# Altium PCB LCD_Dev_PCB.PcbDoc (part 1 of 2)
Units mil, origin at the board's own origin, x right, y up, seen from the top; angles counter-clockwise.
Board outline 2300 x 2120 mil, 4 copper layers (Top Layer, GND, 3.3V, Bottom Layer), stack 35.634 mil thick; 60 components, 58 nets, 366 pads, 68 vias.
Unrouted connection lines stored in the file: 11.
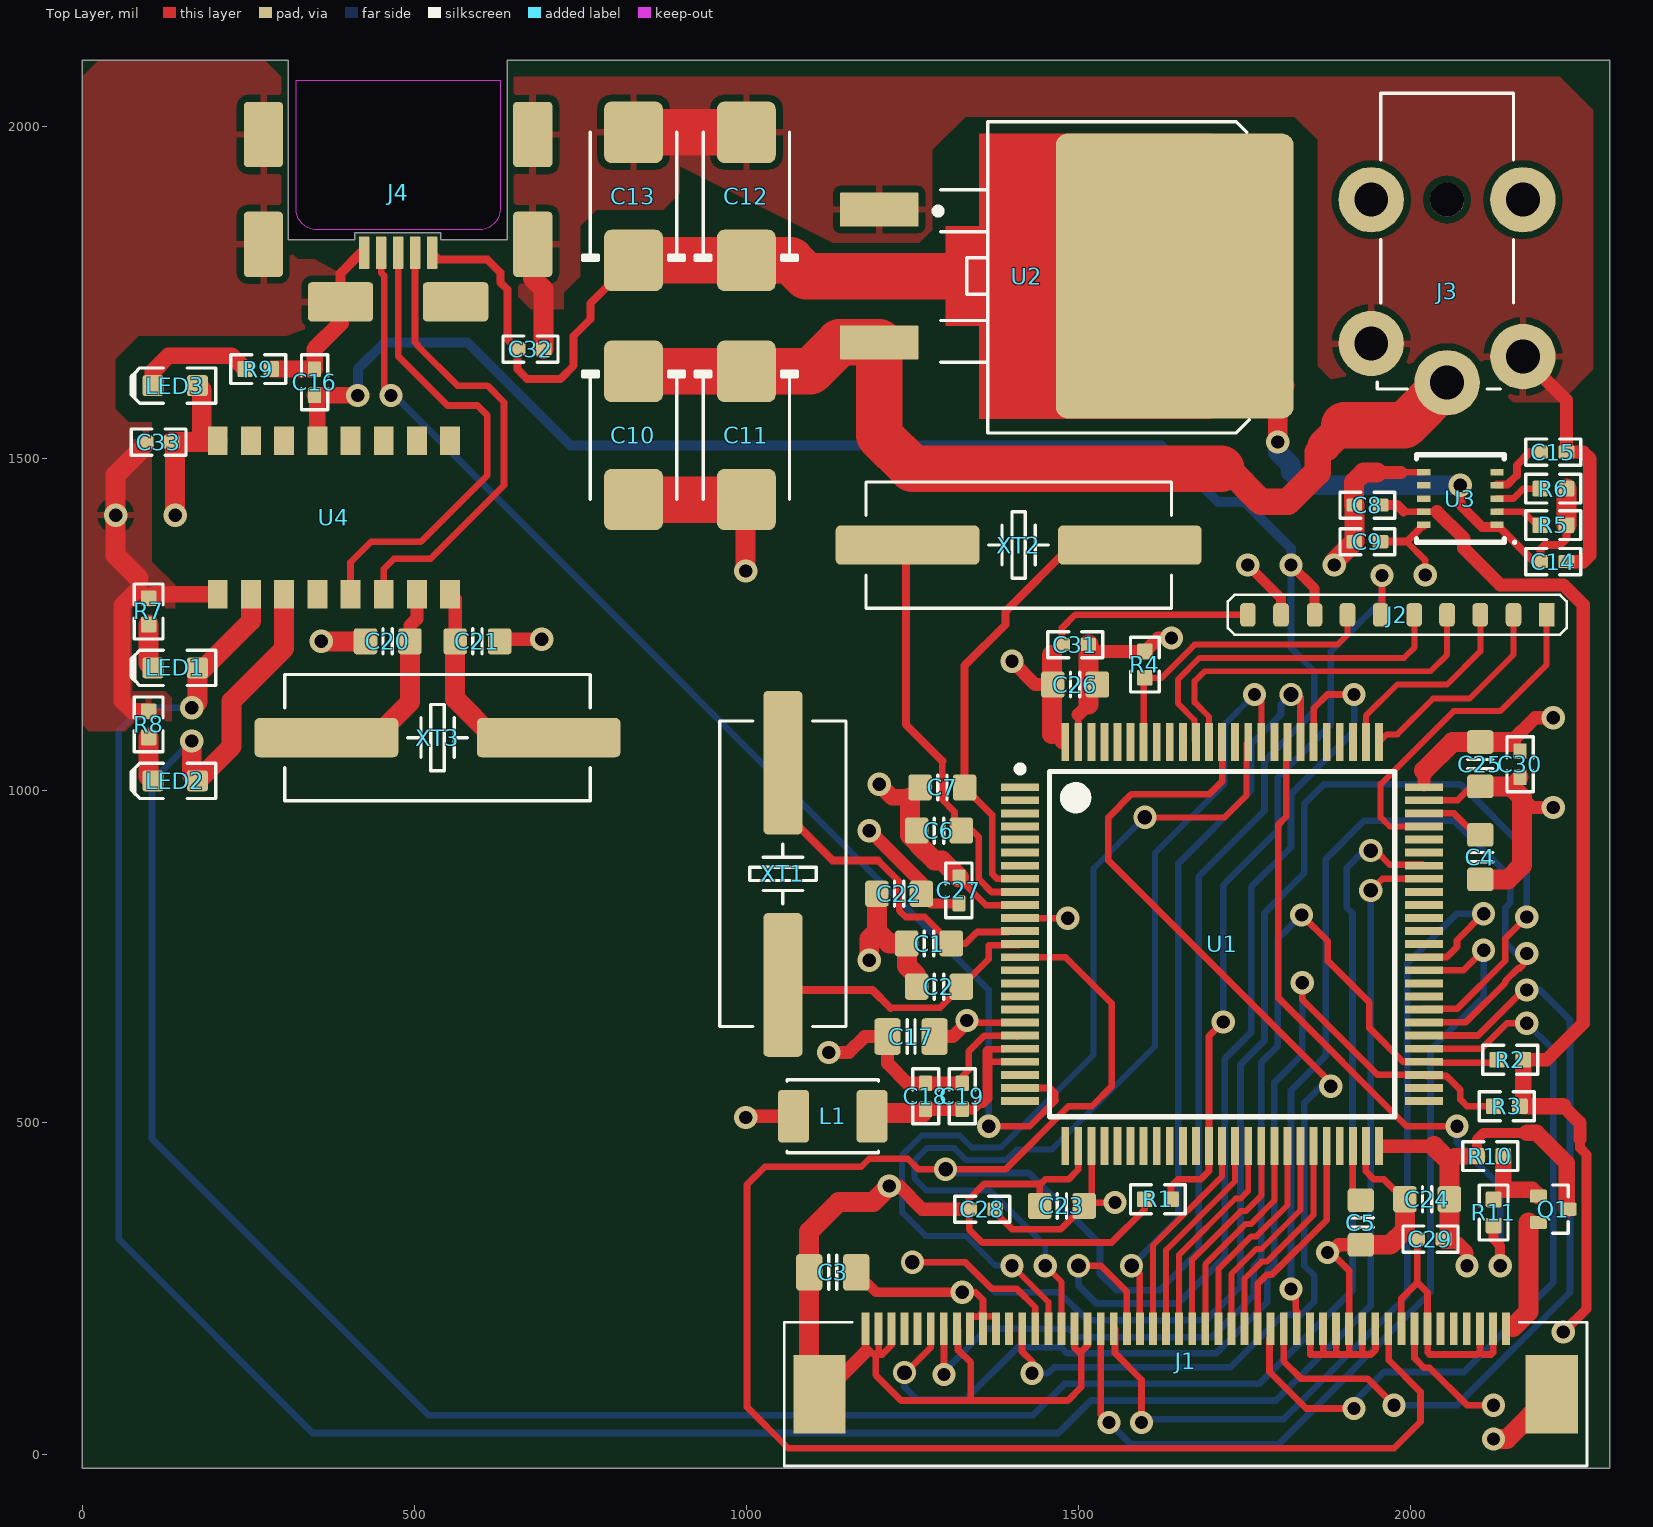
[diagram p0: Top Layer view]
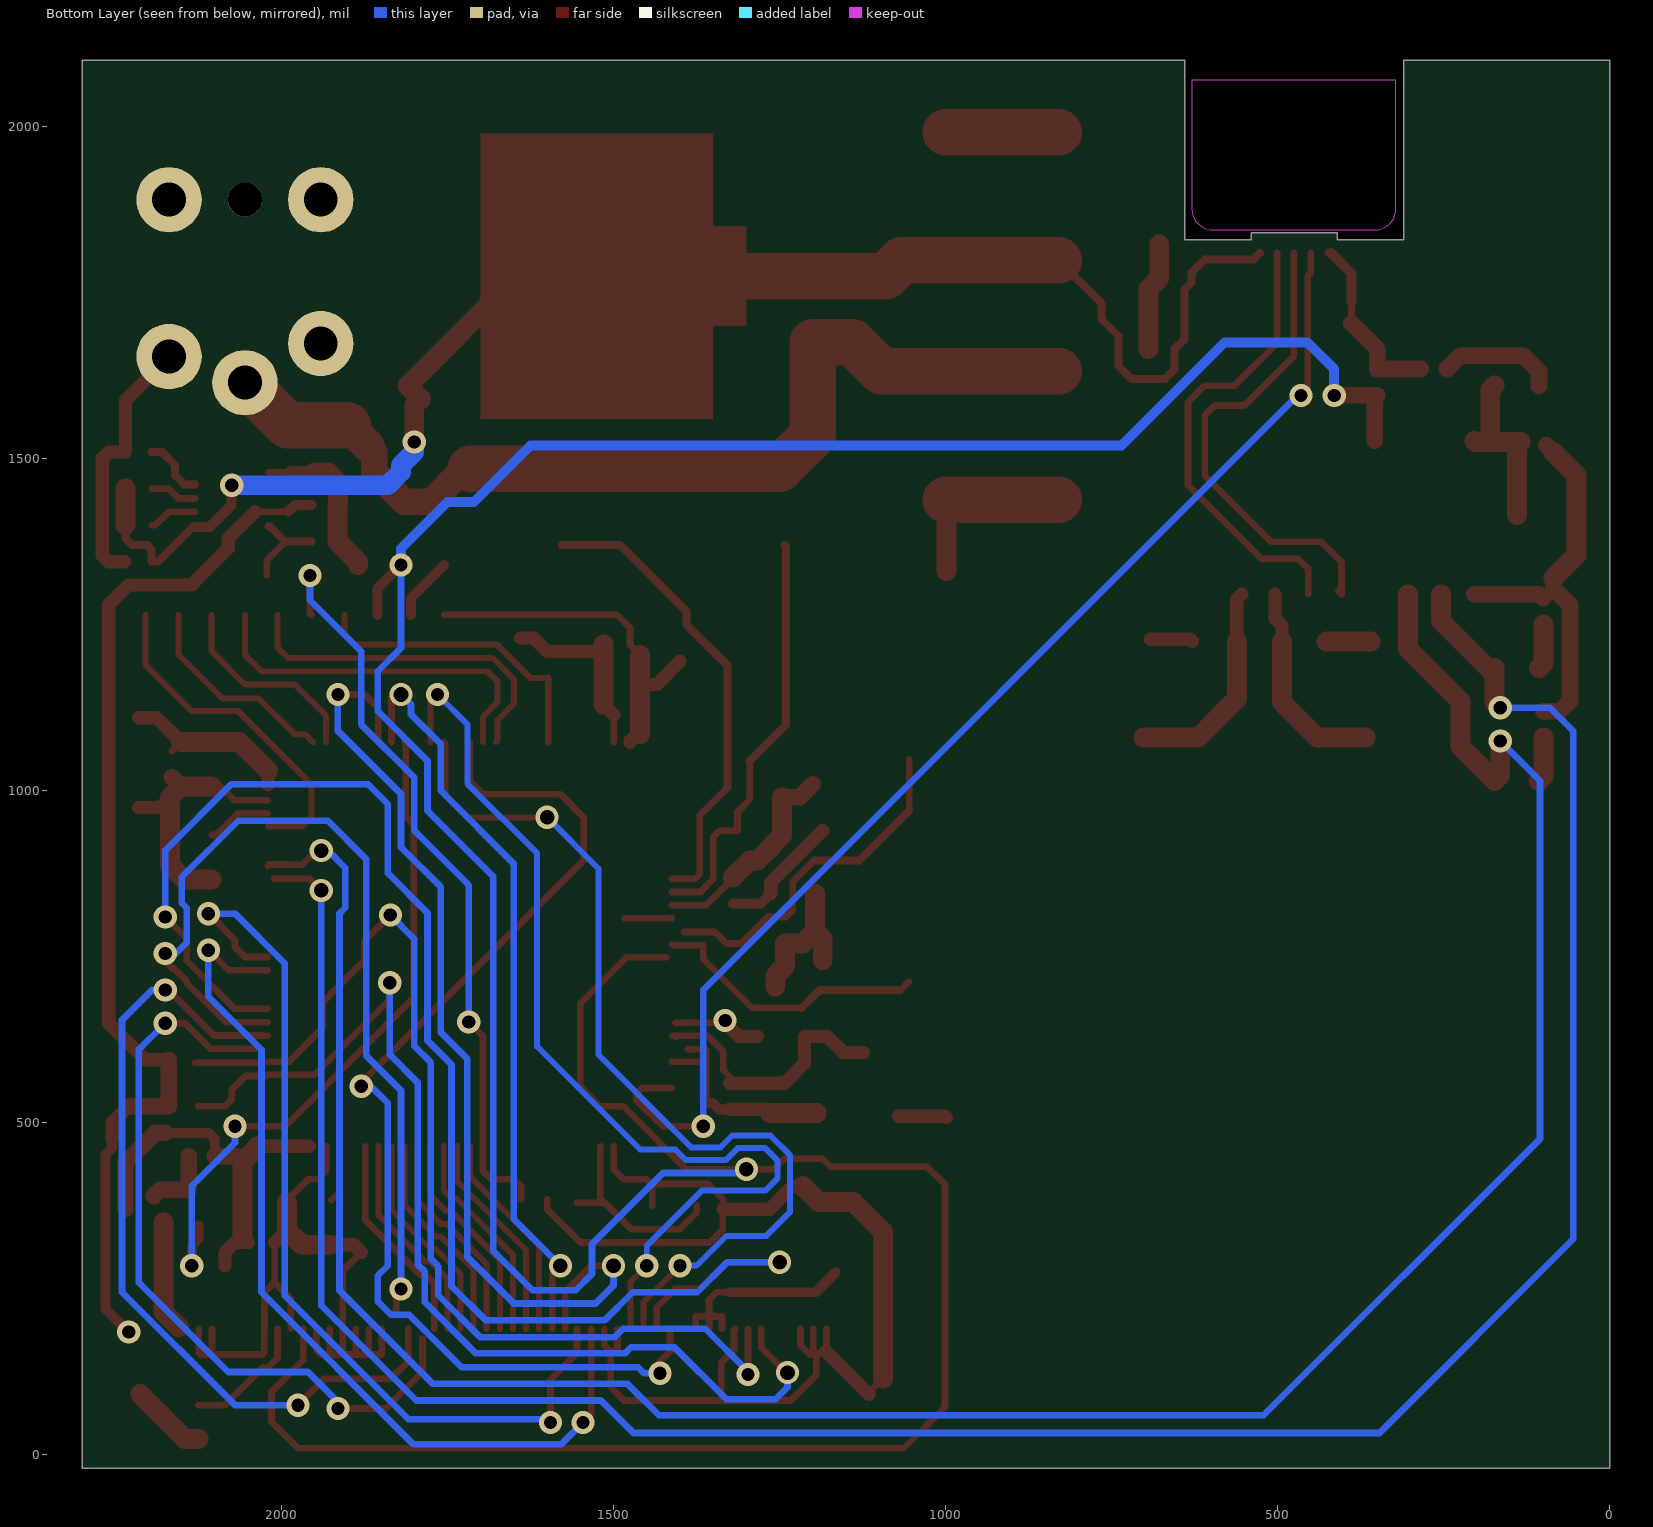
[diagram p1: Bottom Layer view, seen from below]
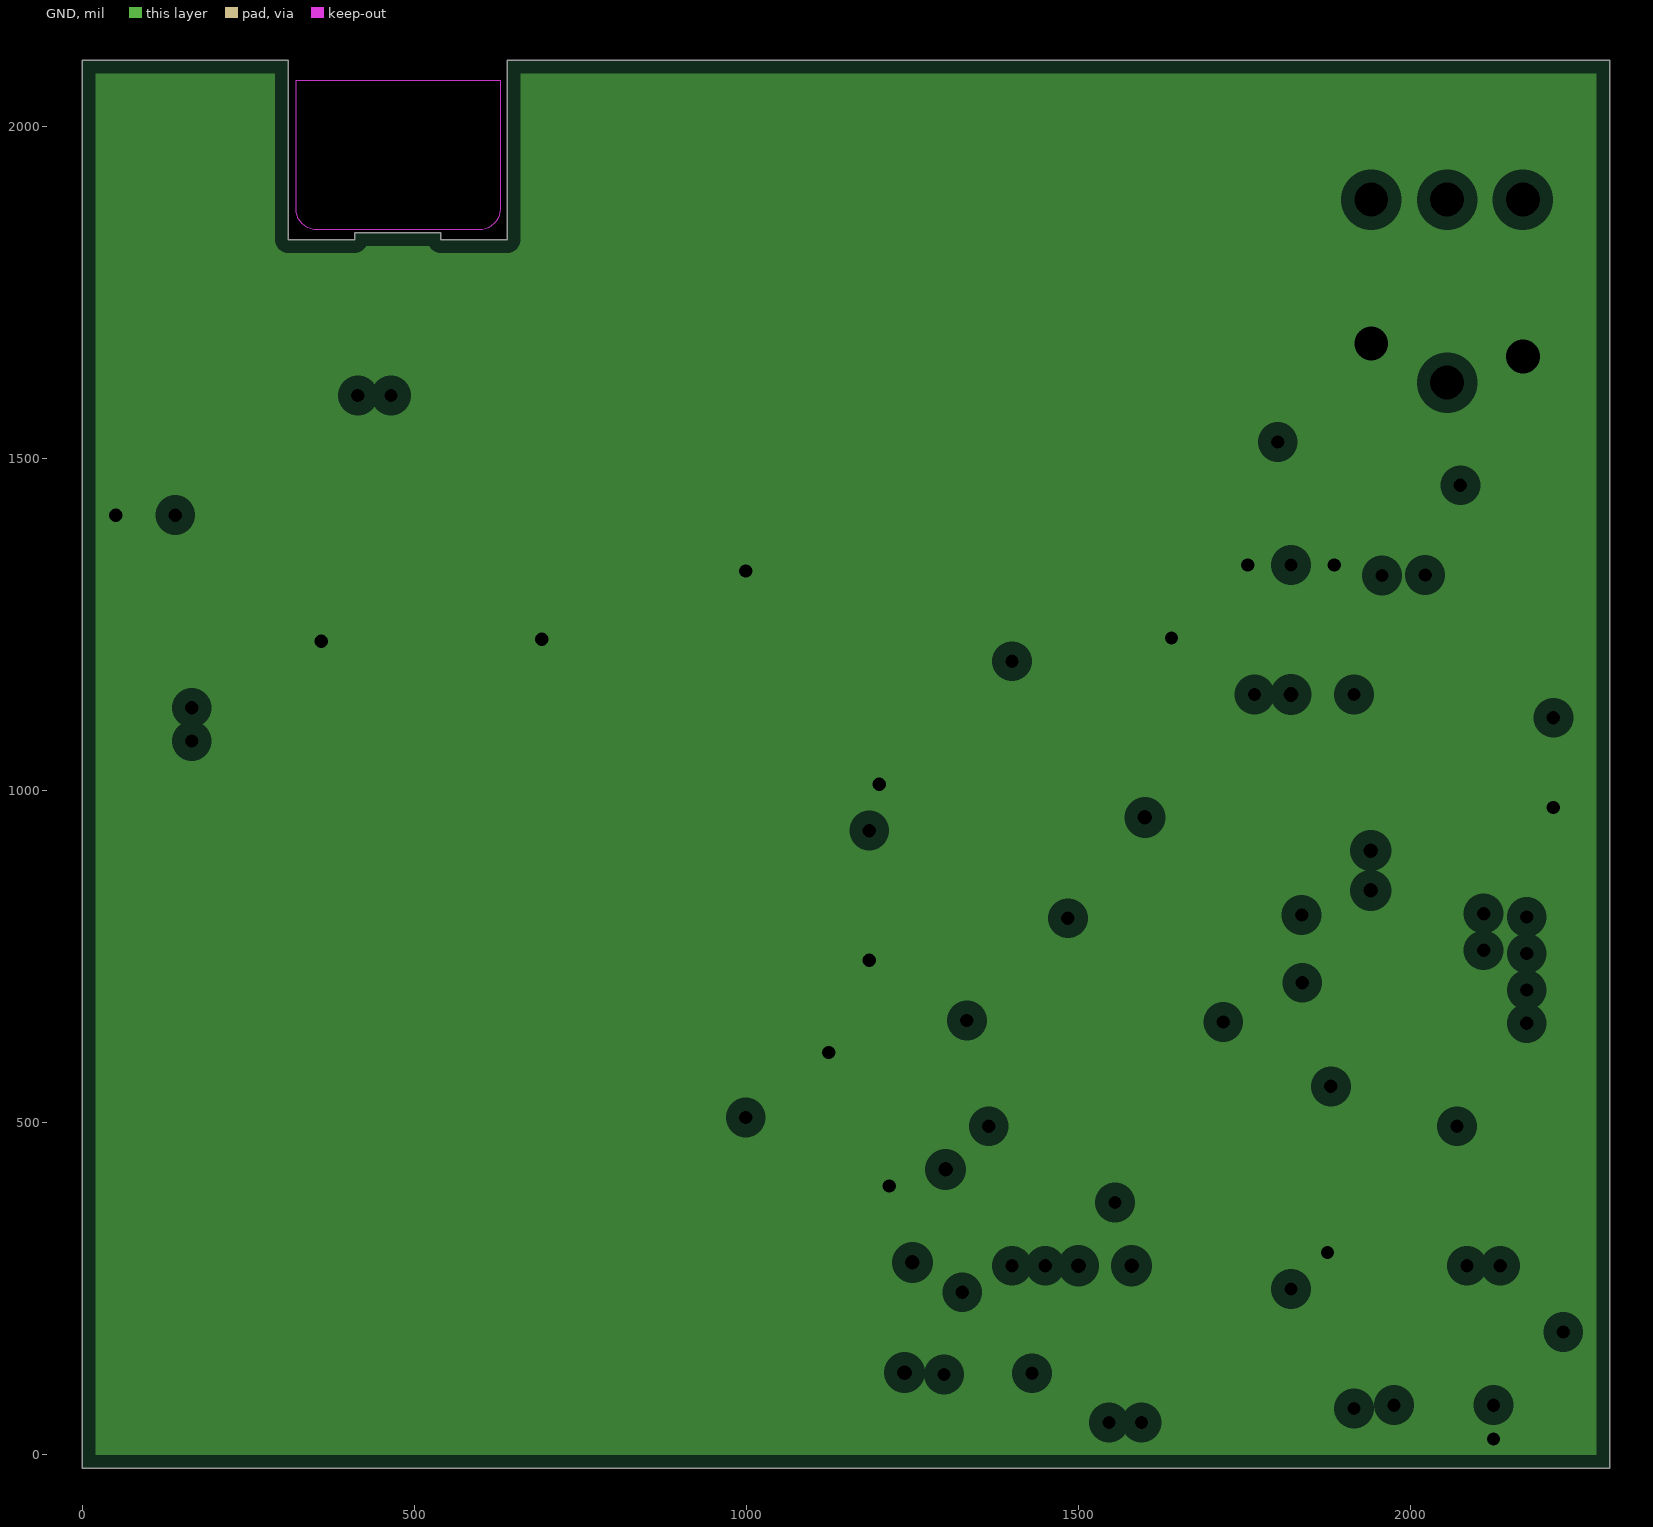
[diagram p2: GND, clearances drawn from the general rule]
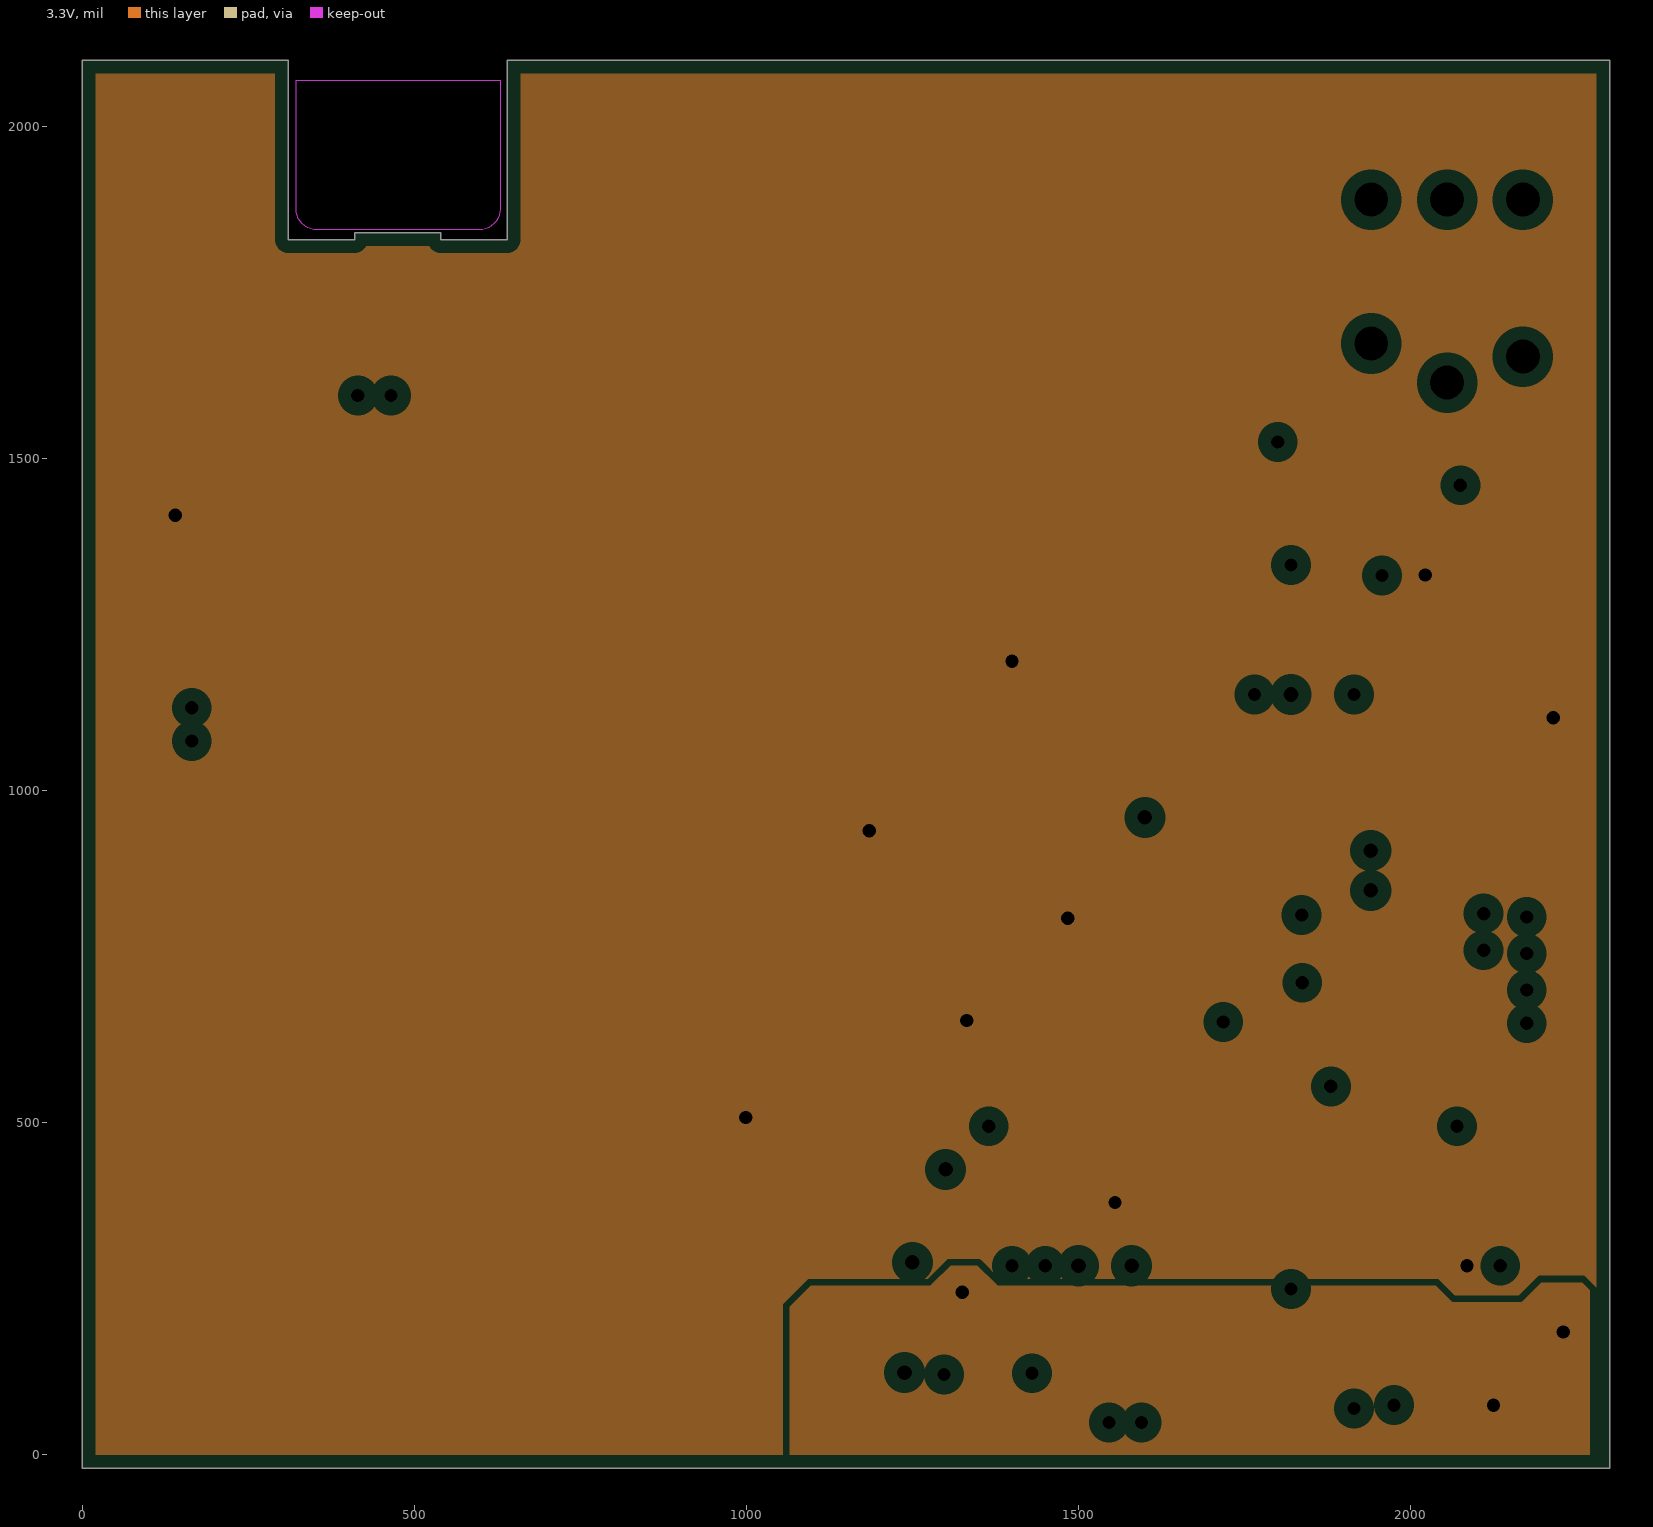
[diagram p3: 3.3V, clearances drawn from the general rule]
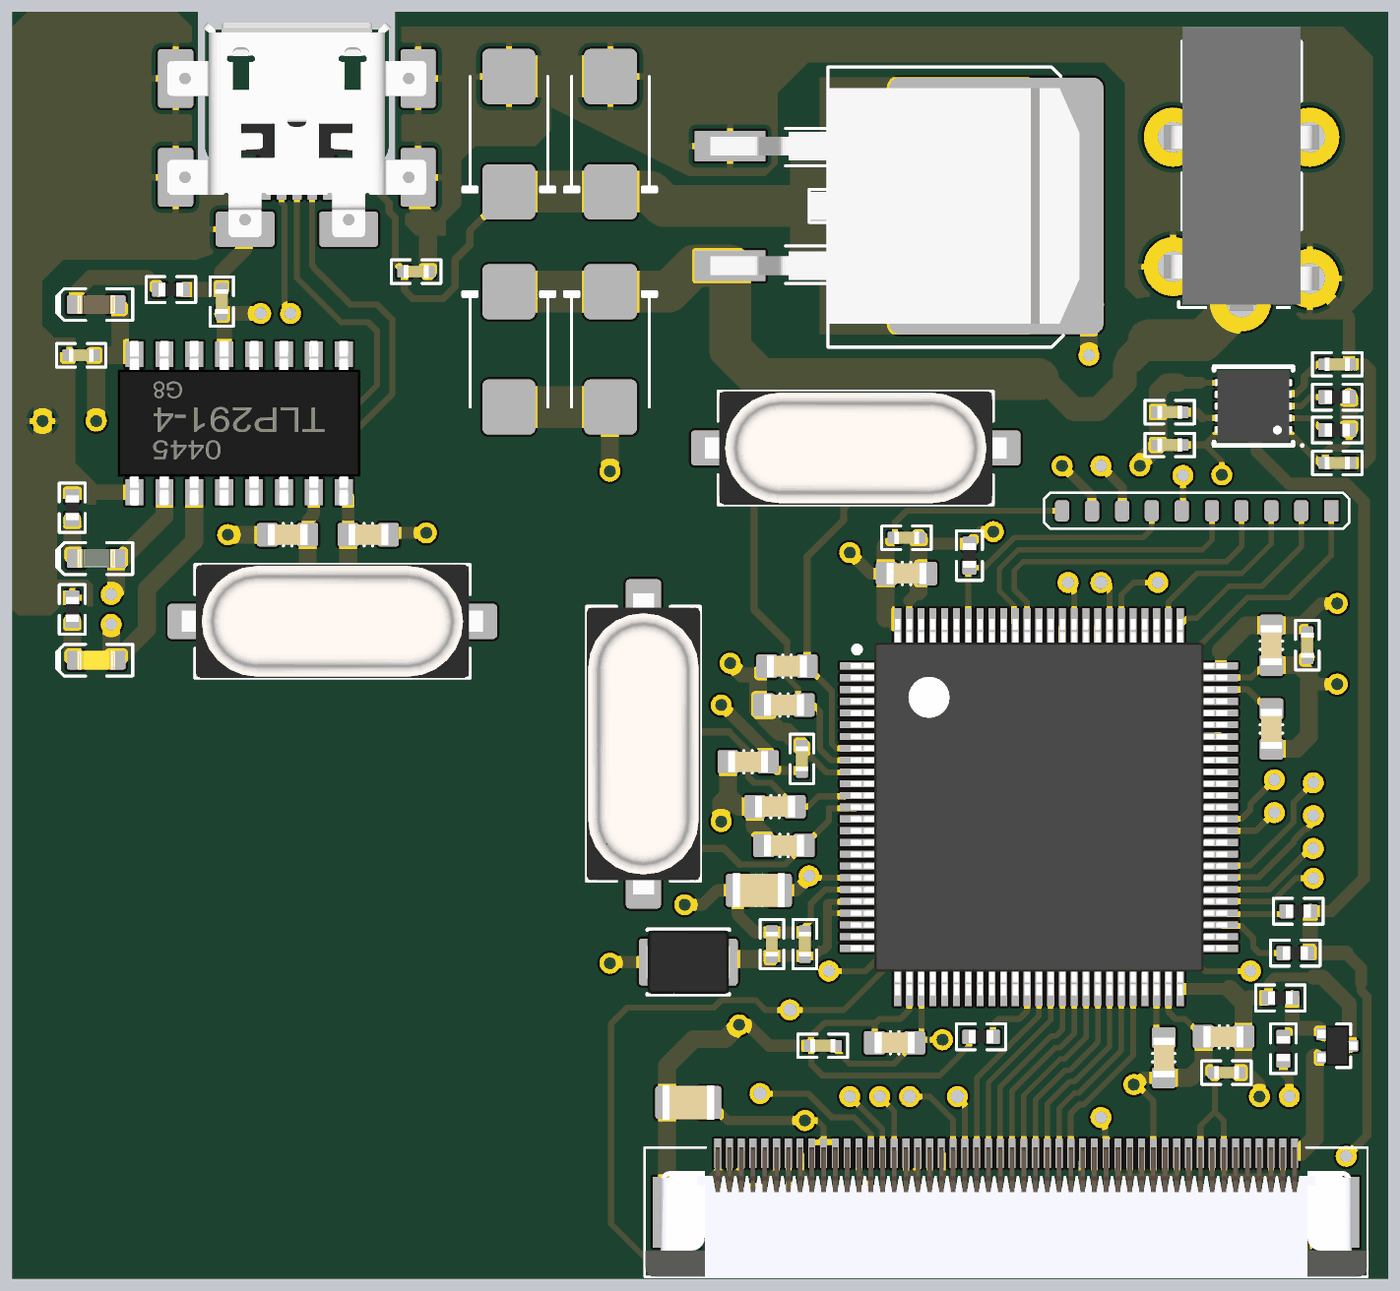
[diagram p4: 3D render of the assembled board from above, using the file's embedded part models]

## Layer stack, top to bottom
Top Solder: solder mask 0.4, Solder Resist, Dk 3.5
Top Layer: signal copper 1.4
Dielectric 1: core 10, FR-4, Dk 4.2
GND: plane copper 1.417, net GND
Dielectric 2: prepreg 10, Dk 4.2
3.3V: plane copper 1.417, net (Multiple Nets)
Dielectric 3: core 10, Dk 4.2
Bottom Layer: signal copper 1.4
Bottom Solder: solder mask 0.4, Solder Resist, Dk 3.5

## Board outline
2300,-20 0,-20 0,2100 310,2100 310,1830 410,1830 410,1840 540,1840 540,1830 640,1830 640,2100 2300,2100

## Design rules (kind name [scope] priority, off if disabled: settings)
Clearance [All] p1: gap=10 ignorepadtopadclearanceinfootprint=FALSE except(0: Arc-Hole Track-Hole SMDPad-Hole THPad-Hole Via-Hole Fill-Hole Poly-Hole Region-Hole Text-Hole; 7: Track-Track Track-SMDPad SMDPad-SMDPad; 9: SMDPad-Poly SMDPad-Region)
MinimumSolderMaskSliver [All] p1: minsoldermaskwidth=1
PlaneClearance [All] p1: clearance=20
PlaneConnect [All] p1: planeconnectstyle=Relief reliefexpansion=20 reliefentries=4 reliefconductorwidth=10 reliefairgap=10
PolygonConnect [All] p1: connectstyle=Relief reliefconductorwidth=10 reliefentries=4 polygonreliefangle="90 Angle" airgapwidth=10
RoutingVias [All] p1: holewidth=28 width=50 viastyle="Through Hole" minholewidth=12 minwidth=20 maxholewidth=28 maxwidth=50
SilkToSilkClearance [All] p1: silktosilkclearance=7
SilkToSolderMaskClearance [IsPad] p1: minsilkscreentomaskgap=0 clearancetoexposedcopper=TRUE
SolderMaskExpansion [All] p1: expansion=4
Width [All] p1: maxlimit=70 minlimit=5 preferedwidth=10 minimp=50.000000 maximp=50.000000 favimp=50.000000
25 further rules are at their usual default settings.

## Components (designator, comment, footprint, x,y, rotation, side; value= is the part's Value field where it differs from the comment)
C1 "approved sub OK" CAPC1608X90N 1275,770 r180 top value=4p7
C2 "approved sub OK" CAPC1608X90N 1290,705 r180 top value=4p7
C3 "approved sub OK" CAPC2012X135N 1130,275 r180 top value=4µ7
C4 "approved sub OK" CAPC1608X90N 2105,900 r270 top value=2u2
C5 "approved sub OK" CAPC1608X90N 1925,350 r270 top value=2u2
C6 "approved sub OK" CAPC1608X90N 1290,940 r180 top value=4p7
C7 "approved sub OK" CAPC1608X90N 1295,1005 r180 top value=4p7
C8 "1µ" CAPC1005X55N 1935,1430 r180 top
C9 "1µ" CAPC1005X55N 1935,1375 r180 top
C10 "47µ" CAPMP6032X280N 830,1535 r270 top
C11 "47µ" CAPMP6032X280N 1000,1535 r270 top
C12 "47µ" CAPMP6032X280N 1000,1895 r90 top
C13 "47µ" CAPMP6032X280N 830,1895 r90 top
C14 "1µ" CAPC1005X55N 2215,1345 r0 top
C15 "10n" CAPC1005X55N 2215,1510 r0 top
C16 "1µ" CAPC1005X55N 350,1615 r90 top
C17 "approved sub OK" CAPC2012X135N 1248,630 r180 top value=4µ7
C18 "1µ" CAPC1005X55N 1270,540 r90 top
C19 "10n" CAPC1005X55N 1325,540 r90 top
C20 "approved sub OK" CAPC1608X90N 460,1225 r180 top value=4p7
C21 "approved sub OK" CAPC1608X90N 595,1225 r0 top value=4p7
C22 "approved sub OK" CAPC1608X90N 1230,845 r180 top value=1µ
C23 "approved sub OK" CAPC1608X90N 1475,375 r180 top value=1µ
C24 "approved sub OK" CAPC1608X90N 2025,385 r180 top value=1µ
C25 "approved sub OK" CAPC1608X90N 2105,1040 r270 top value=1µ
C26 "approved sub OK" CAPC1608X90N 1495,1160 r0 top value=1µ
C27 "10n" CAPC1005X55N 1320,850 r90 top
C28 "10n" CAPC1005X55N 1355,370 r180 top
C29 "10n" CAPC1005X55N 2030,325 r180 top
C30 "10n" CAPC1005X55N 2165,1040 r270 top
C31 "10n" CAPC1005X55N 1495,1220 r0 top
C32 "100n" CAPC1005X55N 675,1665 r0 top
C33 "100n" CAPC1005X55N 115,1525 r180 top
J1 "*" ER-CON50HT-1 2163.39,229.37 r180 top
J2 "*" "SWJ-DP connector" 2235,1295 r180 top
J3 "*" CONN_PWR_JACK_0.7x2.35mm 2055,2075.04 r180 top value="0.7mm ID, 2.35mm OD"
J4 "USB Micro Type B" USB_Micro-B_Molex_SMD 475.59,2064.92 r270 top
L1 "SMD-322522" INDM3225X240N 1130,510 r0 top value=22µ
LED1 "Green" LED-0603-GREEN 140,1185 r180 top
LED2 "Yellow" LED-0603-YELLOW 140,1015 r180 top
LED3 "Red" LED-0603-RED 140,1610 r180 top
Q1 "P-Channel" SOT523F 2215,370 r0 top
R1 "Thick Film" RESC1005X40N 1619.69,385 r180 top value=10K
R2 "Thick Film" RESC1005X40N 2150,595 r180 top value=2K2
R3 "Thick Film" RESC1005X40N 2145,525 r180 top value=2K2
R4 "Thick Film" RESC1005X40N 1600,1190 r90 top value=10K
R5 "Thick Film" RESC1005X40N 2215,1400 r180 top value=2K2
R6 "Thick Film" RESC1005X40N 2215,1455 r180 top value=2K2
R7 "Thick Film" RESC1005X40N 100,1270 r90 top value=2K2
R8 "Thick Film" RESC1005X40N 100,1100 r90 top value=2K2
R9 "Thick Film" RESC1005X40N 265,1635 r0 top value=2K2
R10 "Thick Film" RESC1005X40N 2120,450 r0 top value=10K
R11 "Thick Film" RESC1005X40N 2125,365 r270 top value=330R
U1 "*" LQFP100_STM32F4 1646.26,829.13 r0 top
U2 "AP1086" TO263-3L 1422.5,1775 r180 top
U3 "*" 10LD3X3DFN 2075,1440 r180 top
U4 "*" SOP16 354,1095.9 r90 top
XT1 "6.00MHz" CRYSTAL_HC49-US-SM 1055,875 r270 top
XT2 "6.00MHz" CRYSTAL_HC49-US-SM 1410,1370 r0 top
XT3 "6.00MHz" CRYSTAL_HC49-US-SM 535,1080 r0 top

## Footprints (in the part's own frame and the unit in brackets; to place one, negate y for a bottom-side part, rotate by r counter-clockwise, add the part's x,y. Pads: shape width x height; smd on the part's side, far side on the other; paste and mask are expansions set on the pad)
10LD3X3DFN [mm] "10 PIN DFPNL (DFN) Body 3x3mm, Pitch 0.50mm, IPC Medium Density"
  rect 0.5x0.25 smd: 1(-1.4,1) 2(-1.4,0.5) 3(-1.4,0) 4(-1.4,-0.5) 5(-1.4,-1) 6(1.4,-1) 7(1.4,-0.5) 8(1.4,0) 9(1.4,0.5) 10(1.4,1)
  silkscreen extent -2.12,-1.67 1.67,1.72, body extent -1.63,-1.53 1.63,1.53, height 0.9
CAPC1005X55N [mm] "Chip Capacitor, Body 1.0x0.5mm, EIA 0402, IPC Medium Density"
  round 0.2 on Mech15: 0(0,0)
  rrect20% 0.6x0.5 smd: 1(-0.5,0) 2(0.5,0)
  Top Layer pour cut-out: -0.325,0.375 -0.2,0.5 0.2,0.5 0.325,0.375 0.325,-0.375 0.2,-0.5 -0.2,-0.5 -0.325,-0.375
  silkscreen extent -1.05,-0.5 1.05,0.5, body extent -0.52,-0.27 0.53,0.28, height 0.55
CAPC1608X90N [mm] "Chip Capacitor, Body 1.6x0.8mm, EIA 0603, IPC Medium Density"
  round 0.254 on Mech15: 0(0,0)
  rrect25% 0.9x1 smd: 1(-0.85,0) 2(0.85,0)
  Top Layer pour cut-out: -0.6,0.5 -0.4,0.7 0.4,0.7 0.6,0.5 0.6,-0.5 0.4,-0.7 -0.4,-0.7 -0.6,-0.5
  silkscreen extent -0.18,-0.48 0.18,0.48, body extent -0.85,-0.45 0.85,0.45, height 0.89
CAPC2012X135N [mm] "Chip Capacitor, Body 2.0x1.2mm, EIA 0805, IPC Medium Density"
  round 0.254 on Mech15: 0(0,0)
  rrect25% 1x1.4 smd: 1(-0.9,0) 2(0.9,0)
  Top Layer pour cut-out: -0.675,0.7 -0.475,0.9 0.475,0.9 0.675,0.7 0.675,-0.7 0.475,-0.9 -0.475,-0.9 -0.675,-0.7
  silkscreen extent -0.15,-0.65 0.15,0.65, body extent -1.1,-0.72 1.1,0.73, height 1.34
CAPMP6032X280N [mm] "Capacitor, polarized, Molded Body, EIA 535BAAC size C; 6.00mm L X 3.20mm W X 2.80mm H"
  round 0.508 on Mech15: 0(0,0)
  rrect25% 2.35x2.25 smd: 1(-2.45,0) 2(2.45,0)
  silkscreen extent -2.45,-1.95 2.45,1.95, body extent -3,-1.6 3,1.6, height 2.8
CONN_PWR_JACK_0.7x2.35mm [mm] "Power Connector, 0.7mm ID, 2.35mm OD"
  round 2.5 hole 1.3: 1(0,11.7) 2(-2.9,10.7) 3(2.9,10.2) MH(-2.9,4.7) MH(2.9,4.7)
  round 1.3 hole 1.3 unplated: MH(0,4.7)
  silkscreen extent -2.54,0.63 2.67,11.94, body extent -3.31,0 3.31,12.05, height 5
CRYSTAL_HC49-US-SM [mm] "SMD Crystal HC49/US-SM package"
  round 0.508 on Mech15: 0(0,0)
  rrect25% 5.5x1.5 smd: 1(-4.25,0) 2(4.25,0)
  silkscreen extent -5.84,-2.41 5.84,2.41, body extent -6.4,-2.41 6.4,2.42, height 4.29
ER-CON50HT-1 [mm] "50 pins 0.5mm pitch SMD horizontal type FPC ZIF"
  rect 0.3x1.25 smd: 1(0.5,1) 2(1,1) 3(1.5,1) 4(2,1) 5(2.5,1) 6(3,1) 7(3.5,1) 8(4,1) 9(4.5,1) 10(5,1) 11(5.5,1) 12(6,1) 13(6.5,1) 14(7,1) 15(7.5,1) 16(8,1) 17(8.5,1) 18(9,1) 19(9.5,1) 20(10,1) 21(10.5,1) 22(11,1) 23(11.5,1) 24(12,1) 25(12.5,1) 26(13,1) 27(13.5,1) 28(14,1) 29(14.5,1) 30(15,1) 31(15.5,1) 32(16,1) 33(16.5,1) 34(17,1) 35(17.5,1) 36(18,1) 37(18.5,1) 38(19,1) 39(19.5,1) 40(20,1) 41(20.5,1) 42(21,1) 43(21.5,1) 44(22,1) 45(22.5,1) 46(23,1) 47(23.5,1) 48(24,1) 49(24.5,1) 50(25,1)
  rect 2x3 smd: 51(-1.25,3.5) 52(26.75,3.5)
  silkscreen extent -2.6,0.75 28.1,6.25, body extent -2.57,0.75 28.08,6.25, height 2.06
INDM3225X240N [mm] "Molded Inductor, 2-Leads, Body 3.2x2.5mm, IPC Medium Density"
  round 0.508 on Mech15: 0(0,0)
  rrect25% 1.2x2 smd: 1(-1.5,0) 2(1.5,0)
  silkscreen extent -1.75,-1.4 1.75,1.4, body extent -1.79,-1.35 1.79,1.35, height 2.4
LED-0603-GREEN [mm]
  round 0.254 on Mech15: 0(0,0)
  rrect25% 0.8x0.8 smd: A(-0.85,0) K(0.85,0)
  Top Layer pour cut-out: -0.5,0.5 0.5,0.5 0.5,-0.5 -0.5,-0.5
  silkscreen extent -1.55,-0.67 1.67,0.67, body extent -0.8,-0.4 0.8,0.4, height 0.75
LED-0603-RED [mm]
  round 0.254 on Mech15: 0(0,0)
  rrect25% 0.8x0.8 smd: A(-0.85,0) K(0.85,0)
  Top Layer pour cut-out: -0.5,0.5 0.5,0.5 0.5,-0.5 -0.5,-0.5
  silkscreen extent -1.55,-0.67 1.67,0.67, body extent -0.8,-0.4 0.8,0.4, height 0.75
LED-0603-YELLOW [mm]
  round 0.254 on Mech15: 0(0,0)
  rrect25% 0.8x0.8 smd: A(-0.85,0) K(0.85,0)
  Top Layer pour cut-out: -0.5,0.5 0.5,0.5 0.5,-0.5 -0.5,-0.5
  silkscreen extent -1.55,-0.67 1.67,0.67, body extent -0.8,-0.4 0.8,0.4, height 0.75
LQFP100_STM32F4 [mm] "TSQFP, 100-Leads, Body 14.00x14.00mm, Pitch 0.50mm, IPC Medium Density"
  rect 1.45x0.3 smd: 1(-5.947,4.476) 2(-5.947,3.976) 3(-5.947,3.476) 4(-5.947,2.976) 5(-5.947,2.476) 6(-5.947,1.976) 7(-5.947,1.476) 8(-5.947,0.976) 9(-5.947,0.476) 10(-5.947,-0.024) 11(-5.947,-0.524) 12(-5.947,-1.024) 13(-5.947,-1.524) 14(-5.947,-2.024) 15(-5.947,-2.524) 16(-5.947,-3.024) 17(-5.947,-3.524) 18(-5.947,-4.024) 19(-5.947,-4.524) 20(-5.947,-5.024) 21(-5.947,-5.524) 22(-5.947,-6.024) 23(-5.947,-6.524) 24(-5.947,-7.024) 25(-5.947,-7.524) 51(9.503,-7.524) 52(9.503,-7.024) 53(9.503,-6.524) 54(9.503,-6.024) 55(9.503,-5.524) 56(9.503,-5.024) 57(9.503,-4.524) 58(9.503,-4.024) 59(9.503,-3.524) 60(9.503,-3.024) 61(9.503,-2.524) 62(9.503,-2.024) 63(9.503,-1.524) 64(9.503,-1.024) 65(9.503,-0.524) 66(9.503,-0.024) 67(9.503,0.476) 68(9.503,0.976) 69(9.503,1.476) 70(9.503,1.976) 71(9.503,2.476) 72(9.503,2.976) 73(9.503,3.476) 74(9.503,3.976) 75(9.503,4.476)
  rect 0.3x1.45 smd: 26(-4.222,-9.249) 27(-3.722,-9.249) 28(-3.222,-9.249) 29(-2.722,-9.249) 30(-2.222,-9.249) 31(-1.722,-9.249) 32(-1.222,-9.249) 33(-0.722,-9.249) 34(-0.222,-9.249) 35(0.278,-9.249) 36(0.778,-9.249) 37(1.278,-9.249) 38(1.778,-9.249) 39(2.278,-9.249) 40(2.778,-9.249) 41(3.278,-9.249) 42(3.778,-9.249) 43(4.278,-9.249) 44(4.778,-9.249) 45(5.278,-9.249) 46(5.778,-9.249) 47(6.278,-9.249) 48(6.778,-9.249) 49(7.278,-9.249) 50(7.778,-9.249) 76(7.778,6.201) 77(7.278,6.201) 78(6.778,6.201) 79(6.278,6.201) 80(5.778,6.201) 81(5.278,6.201) 82(4.778,6.201) 83(4.278,6.201) 84(3.778,6.201) 85(3.278,6.201) 86(2.778,6.201) 87(2.278,6.201) 88(1.778,6.201) 89(1.278,6.201) 90(0.778,6.201) 91(0.278,6.201) 92(-0.222,6.201) 93(-0.722,6.201) 94(-1.222,6.201) 95(-1.722,6.201) 96(-2.222,6.201) 97(-2.722,6.201) 98(-3.222,6.201) 99(-3.722,6.201) 100(-4.222,6.201)
  silkscreen extent -6.07,-8.12 8.38,5.3, body extent -6.22,-9.52 9.78,6.48, height 1.6
RESC1005X40N [mm] "Chip Resistor, Body 1.0x0.5mm, EIA 0402, IPC Medium Density"
  round 0.2 on Mech15: 0(0,0)
  rrect20% 0.6x0.6 smd: 1(-0.5,0) 2(0.5,0)
  Top Layer pour cut-out: -0.325,0.375 -0.2,0.5 0.2,0.5 0.325,0.375 0.325,-0.375 0.2,-0.5 -0.2,-0.5 -0.325,-0.375
  silkscreen extent -1.05,-0.55 1.05,0.55, body extent -0.52,-0.27 0.53,0.28, height 0.4
SOP16 [mm]
  rect 1.1x0.76 smd: 1(5.08,3.81) 2(5.08,2.54) 3(5.08,1.27) 4(5.08,0) 5(5.08,-1.27) 6(5.08,-2.54) 7(5.08,-3.81) 8(5.08,-5.08) 9(10.95,-5.08) 10(10.95,-3.81) 11(10.95,-2.54) 12(10.95,-1.27) 13(10.95,0) 14(10.95,1.27) 15(10.95,2.54) 16(10.95,3.81)
  body extent 4.51,-5.78 11.51,4.52, height 2.1
SOT523F [mm] "3 Lead SC89; EIAJ-SC89; SOT523F"
  round 0.254 on Mech15: 0(0,0)
  rrect25% 0.65x0.5 smd: 1(-0.57,0.5) 2(-0.57,-0.5) 3(0.57,0)
  Top Layer pour cut-out: -0.425,0.775 0.425,0.775 0.425,-0.775 -0.425,-0.775
  silkscreen extent -0.02,-0.93 0.58,0.93, body extent -0.85,-0.85 0.85,0.85, height 0.8
"SWJ-DP connector" [mm] "10 pin SWJ-DP PCB connector"
  rrect8% 0.6x0.9 smd: 1(0.762,0.762)
  rrect50% 0.6x0.9 smd: 2(2.032,0.762) 3(3.302,0.762) 4(4.572,0.762) 5(5.826,0.762) 6(7.112,0.762) 7(8.382,0.762) 8(9.636,0.762) 9(10.922,0.762) 10(12.192,0.762)
  silkscreen extent 0,0 12.95,1.52
TO263-3L [mm] "D-PAK/TO-263-3; 3 Leads (1 Cropped); Body 14.7 (inc. leads) x 10.2 mm (LxW max)"
  rrect5% 3x1.3 smd: 1(5.651,-2.54) 3(5.651,2.54)
  rrect10% 9.1x10.9 smd: 2(-5.651,0)
  silkscreen extent -8.5,-5.9 3.52,6, body extent -9.18,-5 6.49,5, height 4.81
USB_Micro-B_Molex_SMD [mm]
  round 0.508 on Mech15: 0(0,0)
  rrect20% 1.25x0.4 smd: 1(6.475,1.3) 2(6.475,0.65) 3(6.475,0) 4(6.475,-0.65) 5(6.475,-1.3)
  rrect20% 2.5x1.5 smd: SH(1.95,5.15) SH(1.95,-5.15) SH(6.15,5.15) SH(6.15,-5.15)
  rrect20% 1.5x2.5 smd: SH(8.35,-2.2) SH(8.35,2.2)
  Keep-Out Layer board cut-out: -0.127,3.9 4.8,3.9 5.106,3.839 5.366,3.666 5.539,3.406 5.6,3.1 5.6,3.1 5.6,-3.1 5.539,-3.406 5.366,-3.666 5.106,-3.839 4.8,-3.9 4.8,-3.9 -0.127,-3.9
  body extent -0.43,-5.5 8.7,5.5, height 1.43

## Part data
C1 C2 C6 C7 C20 C21: library part CAPC_4p7_100V_0603, "Capacitor SMD Cer 4.7pF ±0.25pF 100V NP0 0603", Manufacturer 1="AVX Corporation", Manufacturer Part Number 1=06031A4R7CAT2A, Operating Temperature="-55°C ~ 125°C", Package / Case="0603 (1608 metric)", Ratings="100V; NP0", Supplier Part Number 1=478-4992-1-ND, Tolerance=±0.25pF, SCDType=source*, Supplier 1=Digi-Key
C3 C17: library part CAPC_4u7_0805, "Capacitor SMD Cer 4.7uF 10% 16V X5R 0805", Manufacturer 1="Taiyo Yuden", Manufacturer 2="Samsung Electro-Mechanics America, Inc", Manufacturer 3=Kemet, Manufacturer 4="Murata Electronics North America", Manufacturer 5="TDK Corporation", Manufacturer Part Number 1=EMK212BJ475KG-T, Manufacturer Part Number 2=CL21A475KOFNNNE, Manufacturer Part Number 3=C0805C475K4PACTU, Manufacturer Part Number 4=GRM21BR61C475MA88L, Manufacturer Part Number 5=C2012X5R1C475K125AC, Operating Temperature="-55°C ~ 85°C", Package / Case="0805 (2012 Metric)", Ratings="16V; X5R", Supplier Part Number 1=587-1294-1-ND, Tolerance=±10%, ComponentLink1Description=http://www.yuden.co.jp/productdata/catalog/en/mlcc01_e.pdf, ComponentLink1URL=http://www.yuden.co.jp/productdata/catalog/en/mlcc01_e.pdf, ComponentLink2Description=http://www.samsungsem.com/servlet/FileDownload?type=spec&file=CL21A475KOFNNNE.pdf, ComponentLink2URL=http://www.samsungsem.com/servlet/FileDownload?type=spec&file=CL21A475KOFNNNE.pdf, ComponentLink3Description=http://capacitoredge.kemet.com/capedge2/DataSheet?pn=C0805C475K4PACTU, ComponentLink3URL=http://capacitoredge.kemet.com/capedge2/DataSheet?pn=C0805C475K4PACTU, ComponentLink4Description=http://psearch.murata.com/capacitor/product/GRM21BR61C475MA88#.pdf, ComponentLink4URL=http://psearch.murata.com/capacitor/product/GRM21BR61C475MA88#.pdf, ComponentLink5Description=http://product.tdk.com/capacitor/mlcc/en/documents/mlcc_commercial_general_en.pdf, ComponentLink5URL=http://product.tdk.com/capacitor/mlcc/en/documents/mlcc_commercial_general_en.pdf, Material=ceramic, RoHS 1="RoHS Compliant", RoHS 2="RoHS Compliant", RoHS 3="RoHS Compliant", RoHS 4="RoHS Compliant", RoHS 5="RoHS Compliant", SCDType=spec, Size / Dimension="0.079\" L x 0.049\" W (2.00mm x 1.25mm)", Supplier 1=Digi-Key, Supplier 2=Digi-Key, Supplier 3=Digi-Key, Supplier 4=Digi-Key, Supplier 5=Digi-Key, Supplier Part Number 2=1276-1065-1-ND, Supplier Part Number 3=399-8101-1-ND, Supplier Part Number 4=490-7215-1-ND, Supplier Part Number 5=445-7640-1-ND, Thickness (Max)="0.053\" (1.35mm)"
C4 C5: library part CAPC_2u2_0603_10V_10%, "Capacitor SMD Cer 2.2uF 10% 10V X5R 0603", Manufacturer 1="AVX Corporation", Manufacturer Part Number 1=0603ZD225KAT2A, Package / Case="0603 (1608 metric)", Ratings="10V; X5R", Supplier Part Number 1=478-6212-1-ND, Tolerance=±10%, ComponentLink1Description=http://www.avx.com/docs/Catalogs/cx5r.pdf, ComponentLink1URL=http://www.avx.com/docs/Catalogs/cx5r.pdf, Material=ceramic, SCDType=spec, Supplier 1=Digi-Key
C8 C9 C14 C16 C18: library part CAPC_1u_0402_X5R_6V3_10%, "Capacitor SMD Cer 1uF 10% 16V X5R 0402", Manufacturer 1="AVX Corporation", Manufacturer 2=Yageo, Manufacturer 3="Samsung Electro-Mechanics America, Inc", Manufacturer 4="TDK Corporation", Manufacturer 5="Murata Electronics North America", Manufacturer Part Number 1=04026D105KAT2A, Manufacturer Part Number 2=CC0402KRX5R5BB105, Manufacturer Part Number 3=CL05A105KQ5NNNC, Manufacturer Part Number 4=C1005X5R0J105K050BB, Manufacturer Part Number 5=GRM155R60J105KE19D, Operating Temperature="-55°C ~ 125°C", Package / Case="0402 (1005 Metric)", Ratings="6.3V; X5R", Supplier Part Number 1=478-2583-1-ND, Tolerance=±10%, ComponentLink1Description=http://www.avx.com/docs/Catalogs/cx5r.pdf, ComponentLink1URL=http://www.avx.com/docs/Catalogs/cx5r.pdf, ComponentLink2Description=http://www.yageo.com/documents/recent/UPY-GPHC_X5R_4V-to-50V_12.pdf, ComponentLink2URL=http://www.yageo.com/documents/recent/UPY-GPHC_X5R_4V-to-50V_12.pdf, ComponentLink3Description=http://www.samsungsem.com/servlet/FileDownload?path=productsearch&sname=CL05A105KQ5NNNC.pdf&oname=CL05A105KQ5NNNC.pdf, ComponentLink3URL=http://www.samsungsem.com/servlet/FileDownload?path=productsearch&sname=CL05A105KQ5NNNC.pdf&oname=CL05A105KQ5NNNC.pdf, ComponentLink4Description=http://product.tdk.com/capacitor/mlcc/en/documents/mlcc_commercial_general_en.pdf, ComponentLink4URL=http://product.tdk.com/capacitor/mlcc/en/documents/mlcc_commercial_general_en.pdf, ComponentLink5Description=http://www.murata.com/products/catalog/pdf/c02e.pdf, ComponentLink5URL=http://www.murata.com/products/catalog/pdf/c02e.pdf, RoHS 1="RoHS Compliant", RoHS 2="RoHS Compliant", RoHS 3="RoHS Compliant", RoHS 4="RoHS Compliant", RoHS 5="RoHS Compliant", SCDType=spec, Size / Dimension="0.039\" L x 0.020\" W (1.00mm x 0.50mm)", Supplier 1=Digi-Key, Supplier 2=Digi-Key, Supplier 3=Digi-Key, Supplier 4=Digi-Key, Supplier 5=Digi-Key, Supplier Part Number 2=311-1438-1-ND, Supplier Part Number 3=1276-1010-1-ND, Supplier Part Number 4=445-4998-1-ND, Supplier Part Number 5=490-1320-1-ND
C10 C11 C12 C13: library part CAPT_47u_6032_16V, "Capacitor SMD Tantalum 47uF 10% 16V 6032-28", Manufacturer 1=Vishay/Sprague, Manufacturer Part Number 1=TR3C476K016C0300, Package / Case="EIA 535BAAC size C", Ratings=16V, Supplier Part Number 1=718-1332-1-ND, Tolerance=±10%, Material=Tantalum, SCDType=undef, Supplier 1=Digi-Key
C15 C19 C27 C28 C29 C30 C31: library part CAPC_10n_0402_X7R_16V_10%, "Capacitor SMD Cer 10nF 10% 16V X7R 0402", Manufacturer 1="AVX Corporation", Manufacturer 2=Yageo, Manufacturer Part Number 1=0402YC103KAT2A, Manufacturer Part Number 2=CC0402KRX7R7BB103, Operating Temperature="-55°C ~ 125°C", Package / Case="0402 (1005 Metric)", Ratings="16V; X7R", Supplier Part Number 1=478-1114-1-ND, Tolerance=±10%, ComponentLink1Description=http://www.avx.com/docs/Catalogs/cx7r.pdf, ComponentLink1URL=http://www.avx.com/docs/Catalogs/cx7r.pdf, ComponentLink2Description=http://www.yageo.com/documents/recent/UPY-GPHC_X7R_6.3V-to-50V_8.pdf, ComponentLink2URL=http://www.yageo.com/documents/recent/UPY-GPHC_X7R_6.3V-to-50V_8.pdf, SCDType=spec, Size / Dimension="0.039\" L x 0.020\" W (1.00mm x 0.50mm)", Supplier 1=Digi-Key, Supplier 2=Digi-Key, Supplier Part Number 2=311-1042-1-ND
C22 C23 C24 C25 C26: library part CAPC_1u_0603_X7R_16V_10%, "Capacitor SMD Cer 1uF 10% 16V X7R 0603", Manufacturer 1="TDK Corporation", Manufacturer Part Number 1=C1608X7R1C105K, Package / Case="0603 (1608 metric)", Ratings="16V; X7R", Supplier Part Number 1=445-1604-1-ND, Tolerance=±10%, ComponentLink1Description=http://product.tdk.com/capacitor/mlcc/en/documents/mlcc_commercial_general_en.pdf, ComponentLink1URL=http://product.tdk.com/capacitor/mlcc/en/documents/mlcc_commercial_general_en.pdf, Material=ceramic, SCDType=spec, Supplier 1=Digi-Key
C32 C33: library part CAPC_100n_0402_X5R_16V_10%, "Capacitor SMD Cer 100nF 10% 16V X5R 0402", Manufacturer 1="AVX Corporation", Manufacturer 2=Yageo, Manufacturer Part Number 1=0402YD104KAT2A, Manufacturer Part Number 2=CC0402KRX5R7BB104, Operating Temperature="-55°C ~ 125°C", Package / Case="0402 (1005 Metric)", Ratings="16V; X5R", Supplier Part Number 1=478-1126-1-ND, Tolerance=±10%, ComponentLink1Description=http://www.avx.com/docs/Catalogs/cx5r.pdf, ComponentLink1URL=http://www.avx.com/docs/Catalogs/cx5r.pdf, ComponentLink2Description=http://www.yageo.com/documents/recent/UPY-GPHC_X5R_4V-to-50V_12.pdf, ComponentLink2URL=http://www.yageo.com/documents/recent/UPY-GPHC_X5R_4V-to-50V_12.pdf, SCDType=spec, Size / Dimension="0.039\" L x 0.020\" W (1.00mm x 0.50mm)", Supplier 1=Digi-Key, Supplier 2=Digi-Key, Supplier Part Number 2=311-1347-1-ND
J1: library part LCD-Port, "3.5”TFT LCD Display Port (i80/6800/FSMC etc)"
J2: library part "SWJ-Debug Port", "10 pin Serial Wire JTAG Debug Port"
J3: library part CONN_PWR_JACK_0.7x2.35mm, "Connector Power THT 0.7mm ID x 2.35mm OD", Manufacturer 1=Kobiconn, Manufacturer Part Number 1=163-4307-E, Package / Case="PCB mount", Category=Connectors, HELPURL=http://www.mouser.com/ProductDetail/Kobiconn/163-4307-E/?qs=FrCfMICDGNKiKC02lNlE3g%3D%3D, Mounting Type="Through Hole", SCDType=undef
J4: library part USB_Micro_TypeB, "Connector SMD USB Micro Type B middle mount", Manufacturer 1="Molex Inc", Manufacturer Part Number 1=47491-0001, Package / Case=SMD, Supplier Part Number 1=WM17142CT-ND, SCDType=undef, Supplier 1=Digi-Key
L1: library part INDC_22u_1210_110mA, "Inductor 22uH 110mA 1210 SMD chip", DC Resistance (DCR)="3.7 Ohm", Frequency - Self Resonant=20MHz, Frequency - Test=2.52MHz, Manufacturer 1=3L, Manufacturer Part Number 1=SMD-322522-220K, Operating Temperature="-20°C ~ 80°C", Package / Case="1210 (3225 Metric)", Q @ Freq="30 @ 2.52MHz", Ratings="110 mAdc", Tolerance=±10%, SCDType=source, Supplier 1="APlus Products", Supplier Part Number 1=SMD-322522-220K, Type="Ferrite Core"
LED1: library part LED_SMD_Green_0603_570nm, "LED 0603 SMD Green 570nm 50mcd 20mA", Current - Test=20mA, Manufacturer 1="Kingbright Company LLC", Manufacturer Part Number 1=APT1608CGCK, Package / Case="0603 (1608 metric)", Ratings="20mcd min; 50 mcd typ; 570 nm", Supplier Part Number 1=754-1116-1-ND, Voltage - Forward (Vf) @ 10mA=2.0V, Voltage - Forward (Vf) Typ=2.1V, Color=Green, ComponentLink1Description=http://www.us.kingbright.com/images/catalog/SPEC/APT1608CGCK.pdf, ComponentLink1URL=http://www.us.kingbright.com/images/catalog/SPEC/APT1608CGCK.pdf, Lens Style/Size="Rectangle with Flat Top, 1.1mm x 0.8mm", Lens Type=Clear, Material=AlGaInP, RoHS 1="RoHS Compliant", SCDType=source, Supplier 1=Digi-Key, Viewing Angle=120°, Wavelength - Dominant=570nm, Wavelength - Peak=574nm
LED2: library part LED_SMD_Yellow_0603_150mcd, "LED 0603 SMD Yellow 590nm 150mcd 20mA", Manufacturer 1="Kingbright Company LLC", Manufacturer Part Number 1=APT1608SYCK, Package / Case="0603 (1608 metric)", Ratings="150 mcd; 590 nm", Supplier Part Number 1=754-1124-1-ND, Voltage - Forward (Vf) @ 10mA=1.95V, Voltage - Forward (Vf) Typ=2V, ComponentLink1Description=http://www.us.kingbright.com/images/catalog/SPEC/APT1608SYCK.pdf, ComponentLink1URL=http://www.us.kingbright.com/images/catalog/SPEC/APT1608SYCK.pdf, Material="AlGaInP on GaAs", SCDType=source, Supplier 1=Digi-Key
LED3: library part LED_SMD_Red_0603_220mcd, "LED 0603 SMD Hyper Red 630nm 220mcd 20mA", Manufacturer 1="Kingbright Company LLC", Manufacturer Part Number 1=APT1608SURCK, Package / Case="0603 (1608 metric)", Ratings="220 mcd; 630 nm", Supplier Part Number 1=754-1123-1-ND, Voltage - Forward (Vf) @ 10mA=1.9V, Voltage - Forward (Vf) Typ=1.95V, ComponentLink1Description=http://www.us.kingbright.com/images/catalog/SPEC/APT1608SURCK.pdf, ComponentLink1URL=http://www.us.kingbright.com/images/catalog/SPEC/APT1608SURCK.pdf, Material="AlGaInP on GaAs", SCDType=source, Supplier 1=Digi-Key
Q1: library part MOSFET_P-CH_NTE4151PT1G, "MOSFET SMD P-CH 20V 0.76A 0.313W SOT523F", Manufacturer 1="ON Semiconductor", Manufacturer Part Number 1=NTE4151PT1G, Package / Case="SC-89, SOT523F", Ratings="20V; 760mA; 313mW", Supplier Part Number 1=NTE4151PT1GOSCT-ND, ComponentLink1Description=http://www.onsemi.com/pub_link/Collateral/NTA4151P-D.PDF, ComponentLink1URL=http://www.onsemi.com/pub_link/Collateral/NTA4151P-D.PDF, Rds On (Max) @ Id, Vgs="360 mOhm @ 350mA, 4.5V", SCDType=source, Supplier 1=Digi-Key
R1 R4 R10: library part RES_10K_0402_5%, "Resistor SMD chip 10k Ohm 0.063W 5% 0402", Manufacturer 1="Vishay Dale", Manufacturer 2=Yageo, Manufacturer Part Number 1=CRCW040210K0FKED, Manufacturer Part Number 2=RC0402JR-0710KL, Package / Case="0402 (1005 Metric)", Ratings="1/16 W", Supplier Part Number 1=541-10.0KLCT-ND, Tolerance=±5%, ComponentLink1Description=http://www.vishay.com/doc?20035, ComponentLink1URL=http://www.vishay.com/doc?20035, ComponentLink2Description=http://www.yageo.com/documents/recent/PYu-RC0402_51_RoHS_L_6.pdf, ComponentLink2URL=http://www.yageo.com/documents/recent/PYu-RC0402_51_RoHS_L_6.pdf, SCDType=undef, Supplier 1=Digi-Key, Supplier 2=Digi-Key, Supplier Part Number 2=311-10KJRCT-ND
R2 R3 R5 R6 R7 R8 R9: library part RES_2K2_0402_5%, "Resistor SMD chip 2.2k Ohm 0.063W 5% 0402", Manufacturer 1="Vishay Dale", Manufacturer 2=Yageo, Manufacturer Part Number 1=CRCW04022K20JNED, Manufacturer Part Number 2=RC0402JR-072K2L, Package / Case="0402 (1005 metric)", Ratings="1/16 W", Supplier Part Number 1=541-2.2KJCT-ND, Tolerance=±5%, ComponentLink1Description=http://www.vishay.com/doc?20035, ComponentLink1URL=http://www.vishay.com/doc?20035, ComponentLink2Description=http://www.yageo.com/documents/recent/PYu-RC0402_51_RoHS_L_6.pdf, ComponentLink2URL=http://www.yageo.com/documents/recent/PYu-RC0402_51_RoHS_L_6.pdf, Material="Thick Film", SCDType=spec, Supplier 1=Digi-Key, Supplier 2=Digi-Key, Supplier Part Number 2=311-2.2KJRCT-ND
R11: library part RES_330R_0402_5%, "Resistor SMD chip 330 Ohm 0.063W 5% 0402", Manufacturer 1=Yageo, Manufacturer Part Number 1=RC0402JR-07330RL, Package / Case="0402 (1005 Metric)", Ratings="1/16 W", Supplier Part Number 1=311-330JRCT-ND, Tolerance=±5%, ComponentLink1Description=http://www.yageo.com/documents/recent/PYu-RC0402_51_RoHS_L_6.pdf, ComponentLink1URL=http://www.yageo.com/documents/recent/PYu-RC0402_51_RoHS_L_6.pdf, SCDType=spec, Supplier 1=Digi-Key
U1: library part STM32F413xH, "STM32F413VHT symbol for FSMC application with designated FSMC relevant pins"
U3: library part ISL9014A_IRNJZ, "ISL9014A IRNJZ, Dual LDO, 3.3V and 2.8V, 300mA on both outputs"
U4: library part CH340G, "USB bus conversion chip"
XT1 XT2 XT3: library part Crystal_6MHz_HC49/US, "Resonator Ceramic 6.00 MHz 30ppm", Frequency=6MHz, Frequency Stability=±50ppm, Frequency Tolerance=±30ppm, Load Capacitance=18pF, Manufacturer 1="CTS-Frequency Controls", Manufacturer Part Number 1=ATS060BSM-1, Operating Mode=Fundamental, Operating Temperature="-20°C ~ 70°C", Package / Case=HC49/US-SM, Ratings="6.00 MHz", Supplier Part Number 1=CTX882CT-ND, ComponentLink1Description=http://www.ctscorp.com/components/Datasheets/008-0309-0.pdf, ComponentLink1URL=http://www.ctscorp.com/components/Datasheets/008-0309-0.pdf, Mounting Type="Surface Mount", Parameter Name="0.169\" (4.30mm)", SCDType=spec, Size / Dimension="0.437\" L x 0.190\" W (11.10mm x 4.83mm)", Supplier 1=Digi-Key, Type="MHz Crystal"

## Via types
v1: diameter 35, hole 20, Top Layer to Bottom Layer, 34 vias
v2: diameter 35, hole 20, Top Layer to GND, 14 vias
v3: diameter 35, hole 20, Top Layer to 3.3V, 11 vias
v4: diameter 35, hole 22, Top Layer to Bottom Layer, 9 vias

## Nets (pads, with @x,y where several pads share a name; then routed paths per layer and width w, separated by ;. In a path a pad name is that pad's centre, name@x,y a point inside that pad or via, vN(x,y) a via of type N, cw(c..) or ccw(c..) an arc to the next point about the centre after c; other vN are vias at no path point)
2.8V: C3.1 C8.1 J1.8 J1.40 J1.41 J1.42 R2.1 R3.1 U3.9 | length 2138.2
  Top Layer w10: v3(1325,245) 1345,245 1356.3,233.7 1356.3,215 ; J1.42 1336.61,208.39 1349.69,208.39 1356.3,215 ; J1.41 J1.41@1356.3,208.78 ; J1.40@1375.98,194.02 1375.98,208.78 J1.41@1356.3,208.78 ; 1989.69,1420.31 U3.9 2039.69,1420.31 ; J1.8 2005.91,145.81 2020.46,131.26 2028.74,131.26 2085,75 v3(2125,75) ; J1.41@1356.3,208.78 1356.3,215
  Top Layer w15: C3.1 1195.43,245 v3(1325,245) ; C8.1 1980,1430 1989.69,1420.31 ; v1(2230,185) 2265,220 2265,452.43 2255,462.43 2255,475
  Top Layer w20: 2039.69,1420.31 2080,1380 2080,1365 2135,1310 2230,1310 2260,1280 2260,650 2205,595 R2.1 ; 2230,525 2255,500 2255,475
  Top Layer w25: R2.1 2169.69,525 2230,525
3.3V: C9.1 C17.1 C22.1 C23.1 C24.1 C25.1 C26.1 C27.1 C28.1 C29.1 C30.1 C31.1 C33.1 J2.10 L1.1 LED3.A Q1.3 R10.1 U1.11 U1.19 U1.28 U1.50 U1.75 U1.100 U3.10 U4.16 | length 2603.4
  Top Layer w10: v1@1332,651.02 U1.19@1407.13,651.02 ; C28.1@1374.69,375 C28.1 1374.69,365.31 1400,340 1473.46,340 C23.1 C23.1@1513.46,380 ; U1.11 1412.63,808 v3(1484,808) ; 1460,1204.68 C31.1 1475.32,1245.31 1495,1265 J2.10 ; U1.28@1519.72,465 1519.72,464.69 1520,464.41 1520,386.54 C23.1@1513.46,380 ; v3(1555,380) C23.1@1513.46,380 ; U1.50 1958.53,465 ; 1994.25,1375 2022,1347.25 v3(2022,1325) ; 2151.22,1073.46 C30.1
  Top Layer w12: C9.1 1994.25,1375 2017.57,1398.31 U3.10@2019.88,1398.31
  Top Layer w15: C22.1 1278.15,830.31 C27.1 ; R10.1 2100.32,475.31 2110,485 2175,485
  Top Layer w20: v3(999,508) 1001,510 L1.1 ; v3(1185,940) 1185.84,940 1263.46,862.38 C22.1 ; C17.1 1310.98,630 v1@1332,651.02 ; v3(1400,1195) 1435,1160 1460,1160 C26.1 ; 1460,1085.09 1465,1085.09 1474.72,1075.36 U1.100@1474.72,1073.27 ; 1958.53,465 2035,465 ; U1.75@2020.39,1009 2020.39,1030.39 ; C29.1@2058.46,328.78 2052.19,322.5 2049.69,320 2070,320 2085,305 v3(2085,285) ; 2151.22,1073.46 2187.76,1110 v3(2215,1110)
  Top Layer w25: 2058.46,441.54 2066.93,450 R10.1 ; 2175,485 2190,485 2235,440 Q1.3@2235,370
  Top Layer w30: v3(140,1415) 140,1519.68 C33.1 170,1525 ; LED3.A 180,1603.46 180,1535 170,1525 ; U4.16 202,1525 170,1525 ; 1460,1085.09 1460,1160 1460,1204.68 ; 2020.39,1030.39 2063.46,1073.46 C25.1 2151.22,1073.46 ; 2035,465 2058.46,441.54 C24.1 C29.1@2058.46,328.78
  other v1: 1332,654
5V: C12.1 C13.1 C14.1 C32.1 J4.1 R5.1 R6.1 U2.2 U3.1 | length 2059.4
  Top Layer w12: J4.1 536.77,1800 610,1800 630,1780 630,1765 640,1755 640,1680.31 C32.1 655.32,1634.68 670,1620 720,1620 740,1640 740,1685 765,1710 765,1733.54 C13.1 ; U3.1@2130.12,1399 2131.75,1399 2185.75,1345 C14.1 2195.32,1363.38 2201.94,1370 2225,1370 2234.69,1379.68 R5.1
  Top Layer w15: v1(2075,1460) 2075,1430 2107.5,1397.5 U3.1@2130.12,1397.5
  Top Layer w20: U2.2@1645,1740 U2.2
  Top Layer w30: U2.2 1810,1610 1790,1590 1800,1580 v1(1800,1525) ; R5.1 R6.1
  Top Layer w70: C13.1 C12.1 1066.46,1798.54 1090,1775 1305,1775
  Bottom Layer w30: v1(1800,1525) 1800,1510 1820,1490 1820,1480 1840,1460 v1(2075,1460)
BOOT0: J2.7 R4.1 U1.94 | length 459.1
  Top Layer w9: R4.1@1600,1170 1625.25,1170 1672,1216.75 1672,1217 1675,1220 1890,1220 1905,1235 J2.7
  Top Layer w10: U1.94 R4.1@1598.15,1170.31
BOOT1: J2.6 R1.1 U1.37 | length 1150.5
  Top Layer w10: R1.1 1639.37,404.69 1649.69,415 1683.96,415 1696.57,427.62 U1.37 1696.57,630.57 v1(1718,652) ; J2.6 1957,1267 v1(1957,1324)
  Bottom Layer w10: v1(1718,652) 1718,858 1800,940 1800,1020 1880,1100 1880,1210 1957,1287 v1(1957,1324)
D0: J1.32 U1.61 | length 1390
  Top Layer w10: J1.32@1533.78,190 1533.78,60.66 1546,48.44 v1(1546,49) ; U1.61 2079.76,729.76 v1(2110,760)
  Bottom Layer w10: v1(1546,49) 1579,16 1801,16 2030,245 2030,610 2110,690 v1(2110,760)
D1: J1.31 U1.62 | length 1405.3
  Top Layer w10: J1.31@1554.93,190 1554.93,153.39 1595,113.32 v1(1595,49) ; U1.62@2020.39,749.76 2054.76,749.76 2070,765 2070,775 v1(2110,815)
  Bottom Layer w10: v1(1595,49) 1600,54 1809,54 1995,240 1995,740 2070,815 v1(2110,815)
D2: J1.30 U1.81 | length 1483.2
  Top Layer w10: v4(1500,285) 1534,285 1572.52,246.48 J1.30@1572.52,190 ; U1.81@1854.37,1073.27 1854.37,1124.37 1875,1145 v1(1915,1145)
  Bottom Layer w10: v4(1500,285) 1500,255 1527,228 1650,228 1720,298 1720,596 1760,636 1760,855 1820,915 1820,995 1915,1090 v1(1915,1145)
D3: J1.29 U1.82 | length 1143.1
  Top Layer w10: v4(1580,285) 1592.52,272.48 J1.29 ; v4(1820,1145) 1830,1145 1834.37,1140.63 U1.82
  Bottom Layer w10: v4(1580,285) 1650,355 1650,890 1760,1000 1760,1070 1805,1115 1805,1130 v4(1820,1145)
D4: J1.28 U1.38 | length 318.1
  Top Layer w9: J1.28 1612.2,315.67 1716.26,419.72 U1.38
D5: J1.27 U1.39 | length 318.1
  Top Layer w9: J1.27 1631.89,308.48 1735.94,412.54 U1.39
D6: J1.26 U1.40 | length 322.7
  Top Layer w9: J1.26 1651.57,301.3 1736.38,386.11 1744.18,386.11 1755.63,397.56 U1.40
D7: J1.25 U1.41 | length 322.7
  Top Layer w9: J1.25 1671.26,294.11 1744.25,367.11 1752.05,367.11 1775.32,390.37 U1.41
D8: J1.24 U1.42 | length 322.7
  Top Layer w9: J1.24 1690.94,286.93 1752.12,348.11 1759.92,348.11 1795,383.19 U1.42
D9: J1.23 U1.43 | length 322.7
  Top Layer w9: J1.23 1710.63,279.74 1759.99,329.11 1767.79,329.11 1814.69,376 U1.43
D10: J1.22 U1.44 | length 322.7
  Top Layer w9: J1.22 1730.31,272.56 1767.86,310.11 1775.66,310.11 1834.37,368.82 U1.44
D11: J1.21 U1.45 | length 322.7
  Top Layer w9: J1.21 1750,265.37 1775.73,291.11 1783.53,291.11 1854.06,361.63 U1.45
D12: J1.20 U1.46 | length 322.7
  Top Layer w10: J1.20 1769.69,257.48 1783.81,271.61 1791.61,271.61 1873.74,353.74 U1.46
D13: J1.19 U1.55 | length 1142.9
  Top Layer w10: J1.19@1787.59,175 1787.59,125.41 1843,70 v1(1915,70) ; U1.55@2039.05,611.65 2106.65,611.65 2145,650 v1(2175,650)
  Bottom Layer w10: v1(1915,70) 1915,80 1960,125 2080,125 2215,260 2215,610 v1(2175,650)
D14: J1.18 U1.56 | length 1254.4
  Top Layer w10: J1.18 1809.06,140.94 1835,115 1935,115 v1(1975,75) ; U1.56 2030.45,631.34 2030.76,631.65 2101.65,631.65 2170,700 v1(2175,700)
  Bottom Layer w10: v1(1975,75) 2070,75 2240,245 2240,655 2195,700 v1(2175,700)
D15: J1.17 U1.57 | length 1391.8
  Top Layer w10: v1(1820,250) 1826.96,243.04 1826.96,218.04 1830,215 ; U1.57@2020.39,651.34 2022.16,651.34 2022.48,651.65 2083.37,651.65 2142.5,710.78 2142.5,713.46 2161.54,732.5 2164.22,732.5 2175,743.28 v1(2175,755)
  Bottom Layer w10: v1(1820,250) 1820,549 1872.5,601.5 1872.5,897.5 1930,955 2065,955 2150,870 2150,830.96 2142.5,823.46 2142.5,771.54 2159.04,755 v1(2175,755)
D+: J4.3 U4.5 | length 732.5
  Top Layer w10: U4.5@409,1300.9 U4.5 404,1344 435,1375 510,1375 610,1475 610,1565 595,1580 550,1580 475.59,1654.41 J4.3
D-: J4.2 U4.6 | length 703.2
  Top Layer w10: U4.6 454,1334 469.41,1349.41 524.41,1349.41 635,1460 635,1585 610,1610 565,1610 505,1670 505,1671.57 500.99,1675.58 500.99,1767.22 501.18,1767.41 J4.2
DC: J1.37 U1.58 | length 2282.6
  Top Layer w10: v4(1250,290) 1330,290 1370,250 1407.42,250 1435.04,222.38 J1.37 ; U1.58@2020.39,671.65 2070,671.65 2142.5,744.15 2142.5,777.5 v1(2175,810)
  Bottom Layer w10: v4(1250,290) 1329,290 1374,245 1471,245 1513,203 1693,203 1744,254 1744,588 1780,624 1780,816 1840,876 1840,980 1870,1010 2075,1010 2175,910 v1(2175,810)
GND: C1.2 C2.2 C3.2 C4.2 C5.2 C6.2 C7.2 C8.2 C9.2 C10.2 C11.2 C12.2 C13.2 C14.2 C15.2 C16.2 C17.2 C18.2 C19.2 C20.2 C21.2 C22.2 C23.2 C24.2 C25.2 C26.2 C27.2 C28.2 C29.2 C30.2 C31.2 C32.2 C33.2 J1.2 J1.3 J1.7 J1.9 J1.11 J1.12 J1.13 J1.14 J1.15 J1.16 J1.33 J1.34 J1.43 J1.48 J1.49 J1.50 J1.51 J1.52 J2.9 J3.2 J3.3 J4.5 J4.SH R1.2 R4.2 R7.2 R8.2 R9.2 U1.10 U1.20 U1.27 U1.49 U1.74 U1.99 U2.1 U3.6 U4.1 | length 7314.7
  Top Layer w10: 388.98,1703.98 J4.SH@388.98,1736.18 ; J4.5@420,1810 J4.5 ; J1.52@1094.57,115.28 1110.24,99.61 J1.52 J1.52@1115.47,91.57 ; J1.50@1179.45,190 1179.45,163.59 1191.78,151.26 1194.53,151.26 ; J1.49@1199.13,190 1199.13,155.87 1194.53,151.26 ; J1.48 1218.5,165.3 1204.47,151.26 1194.53,151.26 ; J1.43 1318.71,188.22 1318.71,158.29 1338,139 1338,82 ; C27.2 1320,868.43 1360.87,827.56 U1.10@1412.13,827.56 ; C19.2 1325,570 1335,580 1335,608 1358.02,631.02 1406.1,631.02 U1.20@1407.13,630 ; C28.2@1335,370 1335,385 1358,408 1443,408 1450,415 1485,415 1499.72,429.72 U1.27 ; C28.2 1335.32,339.68 1355,320 1550,320 1600,370 R1.2 ; U1.20@1407.13,631.02 U1.20@1411.81,631.02 ; C23.2 1441.54,406.54 ; J1.34 1494.09,161.91 1502.5,153.5 1504,155 ; U1.99 1499.72,1114.72 ; J1.33 1513.78,164.78 1504,155 ; J1.16@1848.74,190 1848.74,151.26 1887.48,151.26 1888.11,151.89 ; 1868.43,151.57 J1.15@1868.43,190 ; v2@1880,305 1907.48,277.52 J1.13 ; J1.14@1888.11,190 1888.11,151.89 ; J1.13@1907.8,190 1907.8,152.2 ; J1.12@1927.48,190 1927.48,152.52 ; U1.49 1932.8,427.2 1945,415 1960,415 1991.54,383.46 C24.2@1991.54,380 ; J1.11@1947.17,190 1947.17,158.17 1940.26,151.26 1928.74,151.26 1927.48,152.52 ; 1985.63,1479.37 U3.6 ; J1.9 1986.22,235.59 2010.32,259.68 ; C29.2 2010.32,320 2010.32,259.68 ; U1.74@2020.39,985.98 2070.98,985.98 2091.54,1006.54 C25.2 ; J1.7 2025.59,244.41 2010.32,259.68 ; J1.7@2025.91,190 2025.91,154.09 2028.74,151.26 2100.55,151.26 2104.65,155.35 ; J1.3@2104.65,190 2104.65,155.35 ; J1.2@2124.33,190 2124.33,154.33 2121.26,151.26 2108.74,151.26 2104.65,155.35 ; 1194.53,151.26 1194.53,120.51 1233.04,82 1338,82 ; 1338,82 1484,82 1504,102 1504,155 ; 1888.11,151.89 1888.74,151.26 1906.85,151.26 1907.8,152.2 ; 1907.8,152.2 1908.74,151.26 1926.22,151.26 1927.48,152.52
  Top Layer w15: J4.SH@388.98,1736.18 388.98,1778.98 J4.5@420,1810 ; v2(1755,1340) 1805,1290 J2.9
  Top Layer w20: 85,1320 85,1304.68 R7.2 ; C21.2 631.46,1228 v2(692,1228) ; J1.52@1115.47,91.57 1179.45,155.55 ; v2(1124,606) 1154,606 1178,630 C17.2 1212.57,589.43 1242.32,559.68 C18.2 C19.2 ; v2(1215,405) 1230,405 1265,370 1335,370 C28.2 ; 1499.72,1114.72 1515,1130 ; C31.2@1515,1220 1525.32,1209.68 R4.2 1620.32,1230 v2(1640,1230) ; v2@1880,305 1891.54,316.54 C5.2 ; 1949.37,1479.37 1985.63,1479.37 ; 1991.54,338.78 C29.2@2010.32,320 ; 2167.76,990 2182.76,975 v2(2215,975) ; J3.2 2234.69,1588.27 C15.2 2260,1510 2269.69,1500.31 2269.69,1354.68 2260,1345 C14.2@2236.77,1345
  Top Layer w25: 85,1304.68 60,1279.68 60,1135 75.32,1119.68 R8.2 ; 85,1510 C33.2@95.32,1520.31 ; R7.2 106.21,1295.9 U4.1 ; R9.2 349.69,1635 C16.2 350,1665 388.98,1703.98 ; v2(1200,1010) 1220,990 C7.2@1246.54,990 ; 2151.22,1006.54 C30.2
  Top Layer w30: 85,1320 50.36,1354.64 v2(50.36,1415) 50.36,1475.36 85,1510 ; v2(360,1225) C20.2 ; J4.SH@678.35,1822.8 678.35,1771.65 694.69,1755.31 C32.2 ; v2(999,1331) 999,1437.54 C11.2 ; J1.52@1094.57,115.28 C3.2 1094.57,336.57 1139,381 1191,381 v2(1215,405) ; v2(1185,745) 1185,776.93 1196.54,788.46 ; C22.2 1196.54,788.46 ; C7.2@1246.54,990 1246.54,933.04 1259.31,920.27 1259.31,918.85 1283.17,895 1294.69,895 C27.2 ; C2.2 1256.54,721.46 1241.54,736.46 C1.2 1215,770 1196.54,788.46 ; 1515,1130 C31.2@1515,1220 ; v2(1885,1340) 1885,1344.68 C9.2 C8.2 1915,1430.31 1915,1465 1929.37,1479.37 1949.37,1479.37 ; C5.2 1969.29,316.54 1991.54,338.78 C24.2@1991.54,380 ; C4.2 2146.54,866.54 2167.76,887.76 2167.76,990 2151.22,1006.54 C25.2 ; v2(2125,24) 2145.02,24 J1.51
  Top Layer w70: C10.2 C11.2 ; C13.2 C12.2
  other v2: 1875,305
I2C_SCL: J1.44 R2.2 U1.54 | length 1618
  Top Layer w10: v1(1297.56,121) J1.44@1297.56,190 ; v1(1836,813) 1875.5,773.5 1875.5,743.5 1938,681 1938,642.63 1988.34,592.28 U1.54@2020.39,592.28 ; U1.54@2029.72,592.7 2031.91,590.5 R2.2@2130.32,590.5
  Bottom Layer w10: v1(1297.56,121) 1297.56,125.56 1362,190 1486,190 1499,177 1700.43,177 1764,240.57 1764,284.28 1775,295.28 1775,590.72 1800,615.72 1800,777 v1(1836,813)
I2C_SDA: J1.45 R3.2 U1.53 | length 1618.3
  Top Layer w10: v4(1238,124) 1240,124 1277.56,161.56 J1.45 ; v1(1837,711) 1837,686 1950.72,572.28 U1.53 2021.85,572.28 2023.63,570.5 2053.91,570.5 2075,549.41 2075,535 2085,525 R3.2
  Bottom Layer w10: v4(1238,124) 1238,102 1256,84 1330,84 1408,162 1474,162 1483,153 1707,153 1784,230 1784,276 1795,287 1795,561 1837,603 v1(1837,711)
LEDA: J1.1 Q1.2 | length 167.5
  Top Layer w30: 2154.33,192.41 2177.56,215.64 2177.56,350.31
NE1: J1.38 U1.88 | length 1695.3
  Top Layer w10: J1.38@1415.04,190 1415.04,155.96 1430,141 v1(1430,123) ; U1.88 1716.26,1013.76 1697.5,995 1580,995 1545,960 1545,895 1880,560 v1(1880,555)
  Bottom Layer w10: v1(1430,123) 1454,123 1463,132 1729,132 1808,211 1835,211 1855,231 1855,270 1840,285 1840,530 1865,555 v1(1880,555)
NetC15_1: C15.1 U3.4 | length 94.3
  Top Layer w12: U3.4@2130.12,1461 2146,1461 2160,1475 2160,1490 2180,1510 C15.1
NetJ2_1: J2.1 U1.72 | length 520.6
  Top Layer w9: U1.72 1968.7,946.3 1955,960 1955,1010 2065,1120 2135,1120 2205,1190 J2.1
NetJ2_2: J2.2 U1.76 | length 317.1
  Top Layer w9: U1.76 1964.21,1085 1980,1085 2034,1139 2089,1139 2155,1205 J2.2
NetJ2_3: J2.3 U1.77 | length 307
  Top Layer w9: U1.77 1932.8,1112.8 1980,1160 2055,1160 2105,1210 J2.3
NetJ2_4: J2.4 U1.89 | length 557.2
  Top Layer w9: U1.89 1696.57,1111.48 1675,1133.05 1675,1165 1690,1180 2030,1180 2055,1205 J2.4
NetJ2_5: J2.5 U1.90 | length 530.5
  Top Layer w9: U1.90 1674.61,1075.55 1674.61,1106.57 1650,1131.18 1650,1167.88 1682.12,1200 1990,1200 2005.63,1215.63 J2.5
NetLED1_K: LED1.K R7.1 | length 68
  Top Layer w30: R7.1 100,1191.54 LED1.K
NetLED2_K: LED2.K R8.1 | length 68
  Top Layer w30: R8.1 100,1021.54 LED2.K
NetLED3_K: LED3.K R9.1 | length 178.3
  Top Layer w25: LED3.K 106.54,1631.54 130,1655 225.32,1655 R9.1
NetQ1_1: Q1.1 R10.2 R11.1 | length 107.5
  Top Layer w25: R10.2 2139.69,399.37 2182.87,399.37 Q1.1
NetR5_2: R5.2 U3.2 | length 73.5
  Top Layer w10: U3.2@2130.12,1420 2170,1420 2190,1400 R5.2
NetR6_2: R6.2 U3.3 | length 71.4
  Top Layer w10: U3.3 2155,1440 2170,1455 R6.2
NOE: J1.35 U1.85 | length 1517
  Top Layer w9: v1(1450,285) 1474.41,260.59 J1.35 ; v1(1765,1145) 1775.32,1134.68 U1.85
  Bottom Layer w9: v1(1450,285) 1450,315 1367,398 1271.75,398 1253,416.75 1253,443.25 1271.75,462 1313.25,462 1331.25,444 1390.87,444 1406.87,460 1460,460 1615,615 1615,905.77 1720,1010.77 1720,1100 v1(1765,1145)
NRST: C16.1 J1.10 J2.8 U1.14 U4.13 | length 5943.3
  Top Layer w10: U1.14@1420.73,749.45 1480.55,749.45 1550,680 1550,555 1520,525 1485,525 1390,430 v4(1300,430) 1259,430 1243,446 1185,446 1173,434 1028,434 1001,407 1001,72 1063,10 1975,10 2015,50 2015,95 1967.17,142.83 J1.10@1967.17,190
  Top Layer w15: v1(1820,1340) 1855.63,1304.37 J2.8
  Top Layer w25: U4.13 354,1591.31 C16.1 414.69,1595.31 v1(415,1595)
  Bottom Layer w10: v4(1300,430) 1296,430 1290.5,424.5 1425.5,424.5 1532.5,317.5 1532.5,272.5 1557,248 1622,248 1681,307 1681,871 1780,970 1780,1045 1855,1120 1855,1180 1820,1215 v1(1820,1340)
  Bottom Layer w15: v1(415,1595) 415,1635 455,1675 580,1675 735,1520 1625,1520 1710,1435 1750,1435 1820,1365 v1(1820,1340)
NWE: J1.36 U1.86 | length 1406.1
  Top Layer w9: v1(1400,285) 1454.72,230.28 J1.36 ; v4(1600,960) 1720,960 1753.35,993.35 1753.35,1070.99 U1.86
  Bottom Layer w9: v1(1400,285) 1375,285 1330,330 1270,330 1234,366 1234,451.12 1263.88,481 1321.12,481 1339.12,463 1383,463 1523,603 1523,883 v4(1600,960)
PC14: C7.1 U1.8 XT2.2 | length 711.6
  Top Layer w10: C7.1 1370,963.46 1370,875 1377.44,867.56 U1.8
  Top Layer w12: C7.1 1328.46,1188.46 1390,1250 1390,1270 1490,1370 XT2.2
PC15: C6.1 U1.9 XT2.1 | length 635.6
  Top Layer w10: 1295,1045 1295,986.69 1313.46,968.22 1313.46,940 C6.1 1340,940 1350,930 1350,866.72 1369.16,847.56 U1.9@1412.13,847.56
  Top Layer w12: XT2.1 1240,1367.32 1240,1100 1295,1045
PH0: C1.1 U1.12 XT1.1 | length 531.6
  Top Layer w10: XT1.1@1055,970 XT1.1 XT1.1@1055,1047.32 ; 1198.31,895 1230,863.31 1230,820 1240,810 1268.46,810 C1.1 1330,770 1347.35,787.35 U1.12@1393.91,787.35
  Top Layer w12: XT1.1@1055,970 1130,895 1198.31,895
PH1: C2.1 U1.13 XT1.2 | length 425.3
  Top Layer w10: XT1.2@1055,712.68 XT1.2@1067.68,700 ; 1216.69,673.31 1291.78,673.31 C2.1 1365,746.54 1365,767.35 1410.35,767.35 U1.13
  Top Layer w12: XT1.2@1067.68,700 1190,700 1216.69,673.31
Q1: R11.2 U1.83 | length 1041.1
  Top Layer w10: U1.83@1814.37,1073.27 1812.91,1071.8 1812.91,960.91 1801,949 1801,688.04 1994.04,495 v1(2070,495)
  Top Layer w15: R11.2 2125,325 2135,315 v1(2135,285)
  Bottom Layer w10: v1(2070,495) 2070,470 2135,405 v1(2135,285)
RX: LED2.A U1.69 U4.3 | length 3856.7
  Top Layer w10: v4(1940,910) 1947.3,910 1968.65,888.65 1993.52,888.65 1993.89,889.02 2018.61,889.02 U1.69
  Top Layer w30: v1(165,1075) 165,1023.46 LED2.A 225,1066.54 225,1135 304,1214 U4.3
  Bottom Layer w10: v1(165,1075) 105,1015 105,475.96 520.96,60 1432,60 1479,107 1772,107 1912.5,247.5 1912.5,815.5 1904,824 1904,884 1930,910 v4(1940,910)
TX: LED1.A U1.68 U4.2 | length 3896.8
  Top Layer w10: v4(1940,850) 1957.56,867.56 U1.68@2011.79,867.56
  Top Layer w30: v1(165,1125) 173.46,1133.46 LED1.A@173.46,1175 ; LED1.A LED1.A@173.46,1175 ; U4.2 254,1255.54 LED1.A@173.46,1175
  Bottom Layer w10: v1(165,1125) 90,1125 55,1090 55,325 347,33 1470,33 1519,82 1797,82 1940,225 v4(1940,850)
USBID: J4.4 U1.24 | length 1881
  Top Layer w10: J4.4 450,1780 455,1775 455,1605 v1(465,1595) ; v1(1365,495) 1426.72,495 1465.54,533.83 1465,534.37 1465,545 1457.4,552.6 U1.24
  Bottom Layer w10: v1(465,1595) 470,1595 1365,700 v1(1365,495)
VCAP1: C5.1 U1.48 | length 86.6
  Top Layer w10: U1.48@1912.8,465 1912.8,395.67 C5.1
VCAP2: C4.1 U1.73 | length 98.1
  Top Layer w10: U1.73 2065.55,965.98 2098.07,933.46 C4.1
VDDA: C18.1 C19.1 L1.2 U1.21 U1.22 | length 324.6
  Top Layer w10: C18.1@1264.69,515 C18.1 ; 1363.03,591.97 U1.22 ; 1363.03,608.03 1366.02,611.02 U1.21@1388.15,611.02
  Top Layer w15: C19.1 1340.82,520.31 1350.5,530 1356.06,530 1363.03,536.97 1363.03,591.97 1363.03,608.03
  Top Layer w20: C18.1 C19.1
  Top Layer w30: L1.2@1194.06,515 C18.1@1264.69,515
VIN: C10.1 C11.1 J3.1 U2.3 | length 1516.3
  Top Layer w30: 1715,1485 1725,1485 ; 1860,1510 1870,1520
  Top Layer w40: 1725,1485 1775,1435 1815,1435 1860,1480 1860,1510
  Top Layer w50: 1870,1520 1900,1550
  Top Layer w70: C10.1 C11.1 1096.46,1631.46 1140,1675 U2.3 1200,1535 1250,1485 1715,1485 ; 1900,1550 1990.59,1550 J3.1
XI: C20.1 U4.7 XT3.1 | length 314.7
  Top Layer w20: C20.1 493.46,1248.46 504,1259 U4.7
  Top Layer w30: XT3.1 440,1080 493.46,1133.46 C20.1
XO: C21.1 U4.8 XT3.2 | length 325.6
  Top Layer w20: U4.8 561.54,1288.36 C21.1
  Top Layer w30: C21.1 561.54,1138.46 620,1080 XT3.2
pads on no net: C1.0 C2.0 C3.0 C4.0 C5.0 C6.0 C7.0 C8.0 C9.0 C10.0 C11.0 C12.0 C13.0 C14.0 C15.0 C16.0 C17.0 C18.0 C19.0 C20.0 C21.0 C22.0 C23.0 C24.0 C25.0 C26.0 C27.0 C28.0 C29.0 C30.0 C31.0 C32.0 C33.0 J1.4 J1.5 J1.6 J1.39 J1.46 J1.47 J3.MH J4.0 L1.0 LED1.0 LED2.0 LED3.0 Q1.0 R1.0 R2.0 R3.0 R4.0 R5.0 R6.0 R7.0 R8.0 R9.0 R10.0 R11.0 U1.1 U1.2 U1.3 U1.4 U1.5 U1.6 U1.7 U1.15 U1.16 U1.17 U1.18 U1.23 U1.25 U1.26 U1.29 U1.30 U1.31 U1.32 U1.33 U1.34 U1.35 U1.36 U1.47 U1.51 U1.52 U1.59 U1.60 U1.63 U1.64 U1.65 U1.66 U1.67 U1.70 U1.71 U1.78 U1.79 U1.80 U1.84 U1.87 U1.91 U1.92 U1.93 U1.95 U1.96 U1.97 U1.98 U3.5 U3.7 U3.8 U4.4 U4.9 U4.10 U4.11 U4.12 U4.14 U4.15 XT1.0 XT2.0 XT3.0

## Polygon pours and split planes (outlines as drawn)
GND on Top Layer "GND" (solid, pour order 2): 900,2075 900,1900 875,1875 775,1875 750,1850 750,1775 725,1750 725,1725 675,1725 650,1750 650,2075
GND on Top Layer "GND" (solid, pour order 8): 2225,2075 2275,2025 2275,1635 2226,1585 2155,1585 2095,1645 2095,1650 2015,1650 1980,1635 1880,1620 1860,1640 1860,1980 1825,2015 1330,2015 1280,1965 1280,1845 1260,1825 1130,1825 900,1940 900,2075
GND on Top Layer "GND" (solid, pour order 6): 300,2075 300,1825 325,1800 350,1800 388.98,1778.98 388.98,1713.98 308.17,1685 85,1685 50,1650 50,1575 70,1555 105,1555 105,1460 105,1440 105,1405 105,1390 105,1345 125,1325 140,1310 140,1275 75,1275 75,1150 125,1150 135,1140 135,1105 80,1105 65,1090 10,1090 0,1100 0,2075 25,2100 275,2100
GND on GND (split plane): 2279.9,0.1 20.1,0.1 20.1,2079.9 289.9,2079.9 289.9,1830 290.29,1826.08 291.43,1822.31 293.29,1818.83 295.79,1815.79 298.83,1813.29 302.31,1811.43 306.08,1810.29 310,1809.9 410,1809.9 413.92,1810.29 417.69,1811.43 421.17,1813.29 424.21,1815.79 426.71,1818.83 427.28,1819.9 522.72,1819.9 523.29,1818.83 525.79,1815.79 528.83,1813.29 532.31,1811.43 536.08,1810.29 540,1809.9 640,1809.9 643.92,1810.29 647.69,1811.43 651.17,1813.29 654.21,1815.79 656.71,1818.83 658.57,1822.31 659.71,1826.08 660.1,1830 660.1,2079.9 2279.9,2079.9
2.8V on 3.3V (split plane): 1376.4,256.4 1378.05,255.29 1380,254.9 2037.89,254.9 2061.4,231.4 2063.05,230.29 2065,229.9 2165,229.9 2166.95,230.29 2168.6,231.4 2197.11,259.9 2257.89,259.9 2269.9,247.89 2269.9,190 2269.9,0.1 1065.1,0.1 1065.1,180 1064.9,181 1065.1,182.01 1065.1,222.89 1097.11,254.9 1275,254.9 1276.95,255.29 1278.6,256.4 1307.11,284.9 1347.89,284.9
3.3V on 3.3V (split plane): 2279.9,250.98 2279.71,251.95 2278.6,253.6 2263.6,268.6 2261.95,269.71 2260,270.1 2195,270.1 2193.05,269.71 2191.4,268.6 2162.89,240.1 2067.11,240.1 2043.6,263.6 2041.95,264.71 2040,265.1 1382.11,265.1 1353.6,293.6 1351.95,294.71 1350,295.1 1305,295.1 1303.05,294.71 1301.4,293.6 1272.89,265.1 1095,265.1 1093.05,264.71 1091.4,263.6 1056.4,228.6 1055.29,226.95 1054.9,225 1054.9,182.01 1055.1,181 1054.9,180 1054.9,0.1 20.1,0.1 20.1,2079.9 289.9,2079.9 289.9,1830 290.29,1826.08 291.43,1822.31 293.29,1818.83 295.79,1815.79 298.83,1813.29 302.31,1811.43 306.08,1810.29 310,1809.9 410,1809.9 413.92,1810.29 417.69,1811.43 421.17,1813.29 424.21,1815.79 426.71,1818.83 427.28,1819.9 522.72,1819.9 523.29,1818.83 525.79,1815.79 528.83,1813.29 532.31,1811.43 536.08,1810.29 540,1809.9 640,1809.9 643.92,1810.29 647.69,1811.43 651.17,1813.29 654.21,1815.79 656.71,1818.83 658.57,1822.31 659.71,1826.08 660.1,1830 660.1,2079.9 2279.9,2079.9

## Other copper
Top Layer:
  region net 5V: 1300,1850 1300,1700 1450,1700 1450,1850
  region net 5V: 1350,1700 1350,1560 1450,1560 1450,1700